# Altium PCB 175-00060, rev1, PCB, NRES RTD_TEC Board.PcbDoc (part 1 of 3)
Units mm, origin at the board's own origin, x right, y up, seen from the top; angles counter-clockwise.
Board outline 188.3 x 85 mm, 7 copper layers (Top Layer (*.GTL), MidLayer1 (*.G1), InternalPlane1 (*.GP1), InternalPlane2 (*.GP2), InternalPlane3 (*.GP3), InternalPlane4 (*.GP4), Bottom Layer (*.GBL)); 241 components, 178 nets, 958 pads, 584 vias.
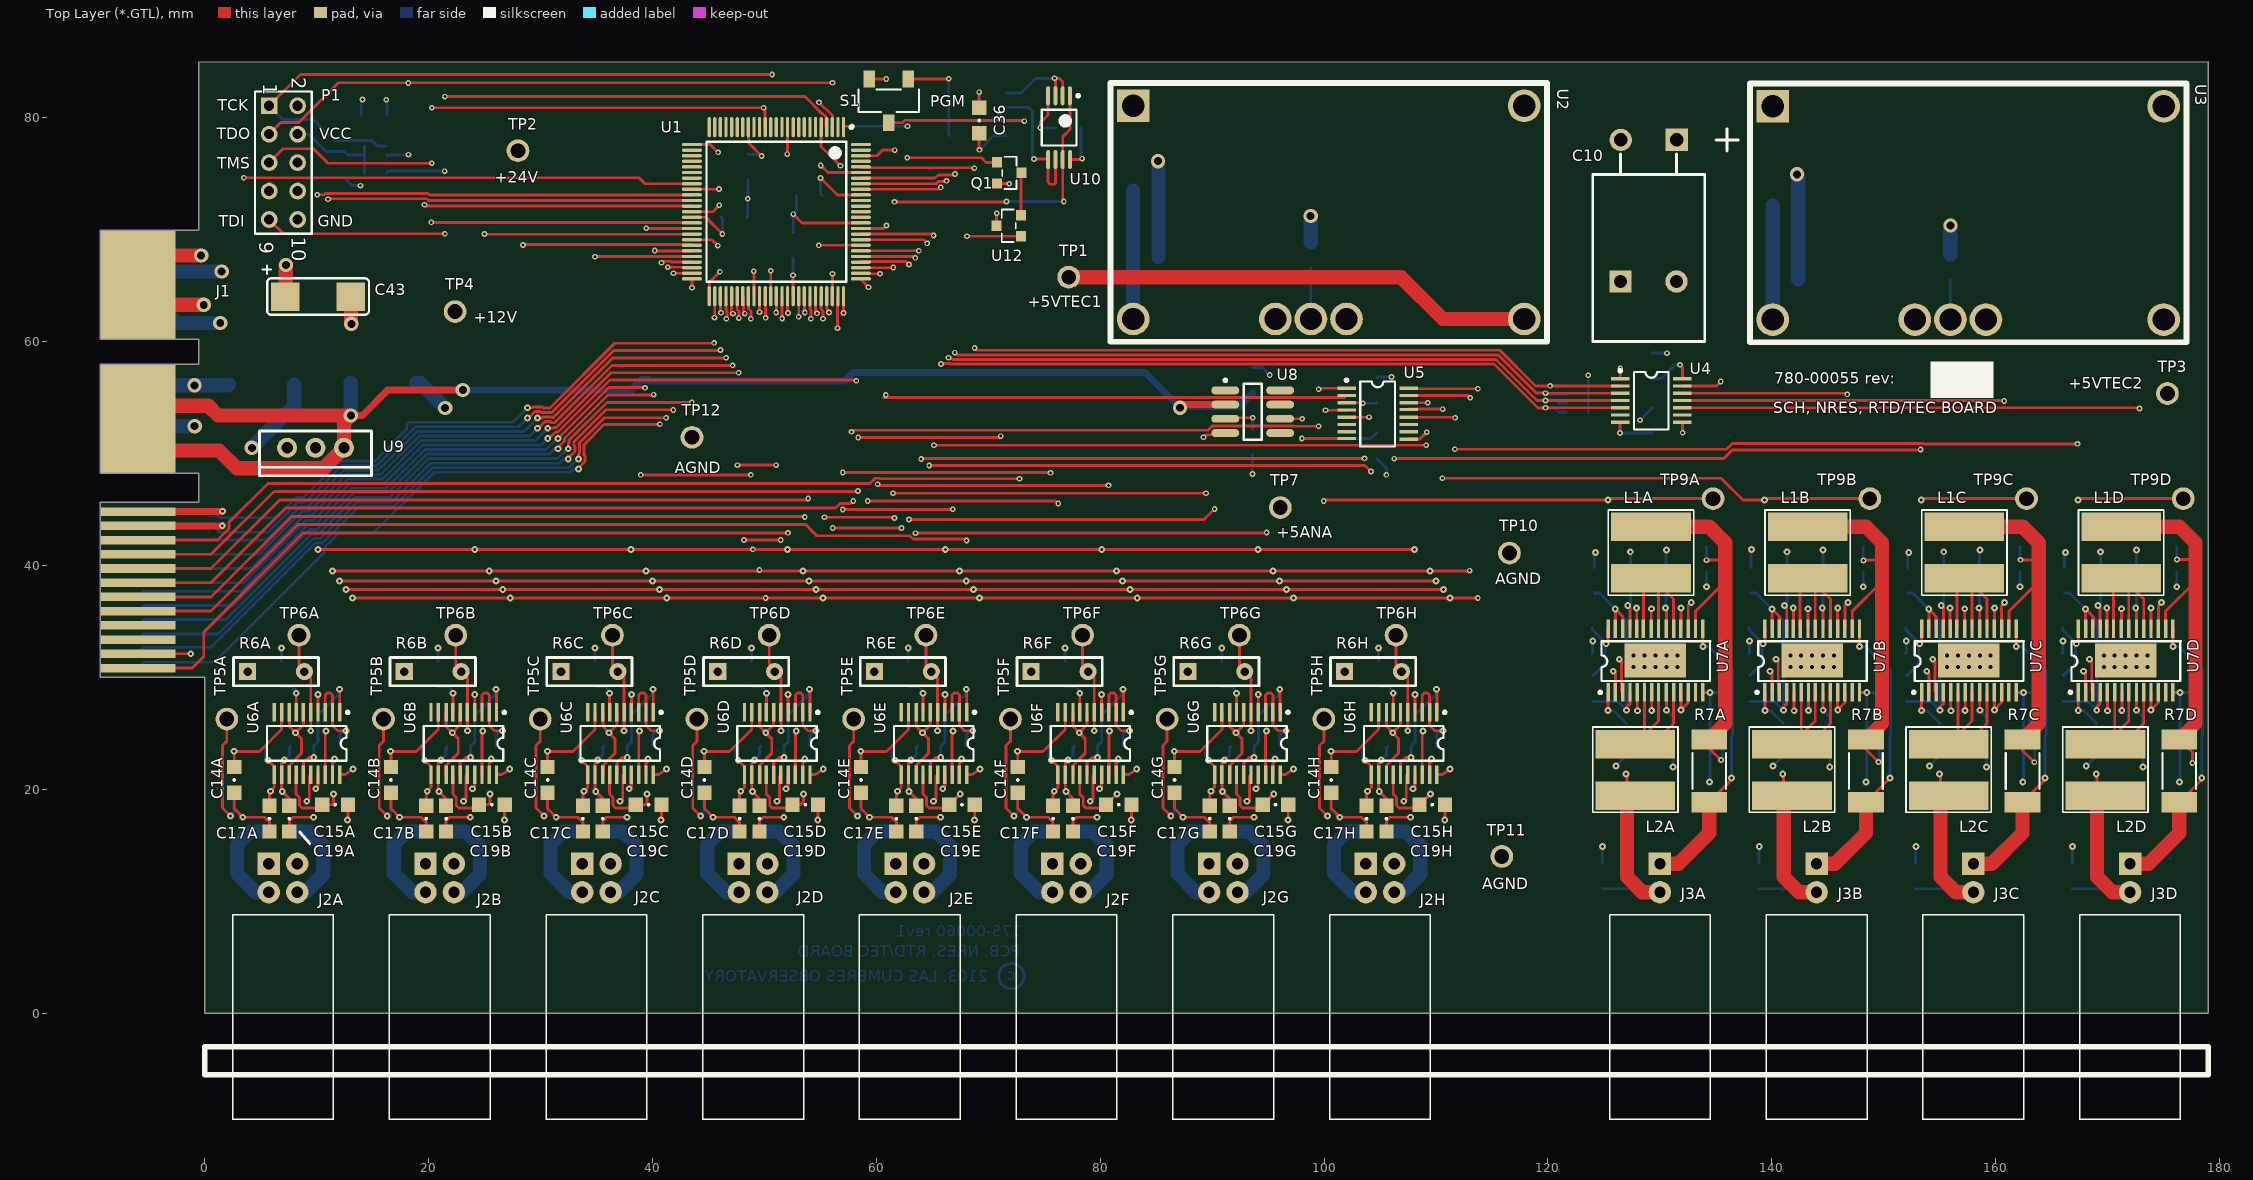
[diagram p0: Top Layer (*.GTL) view]
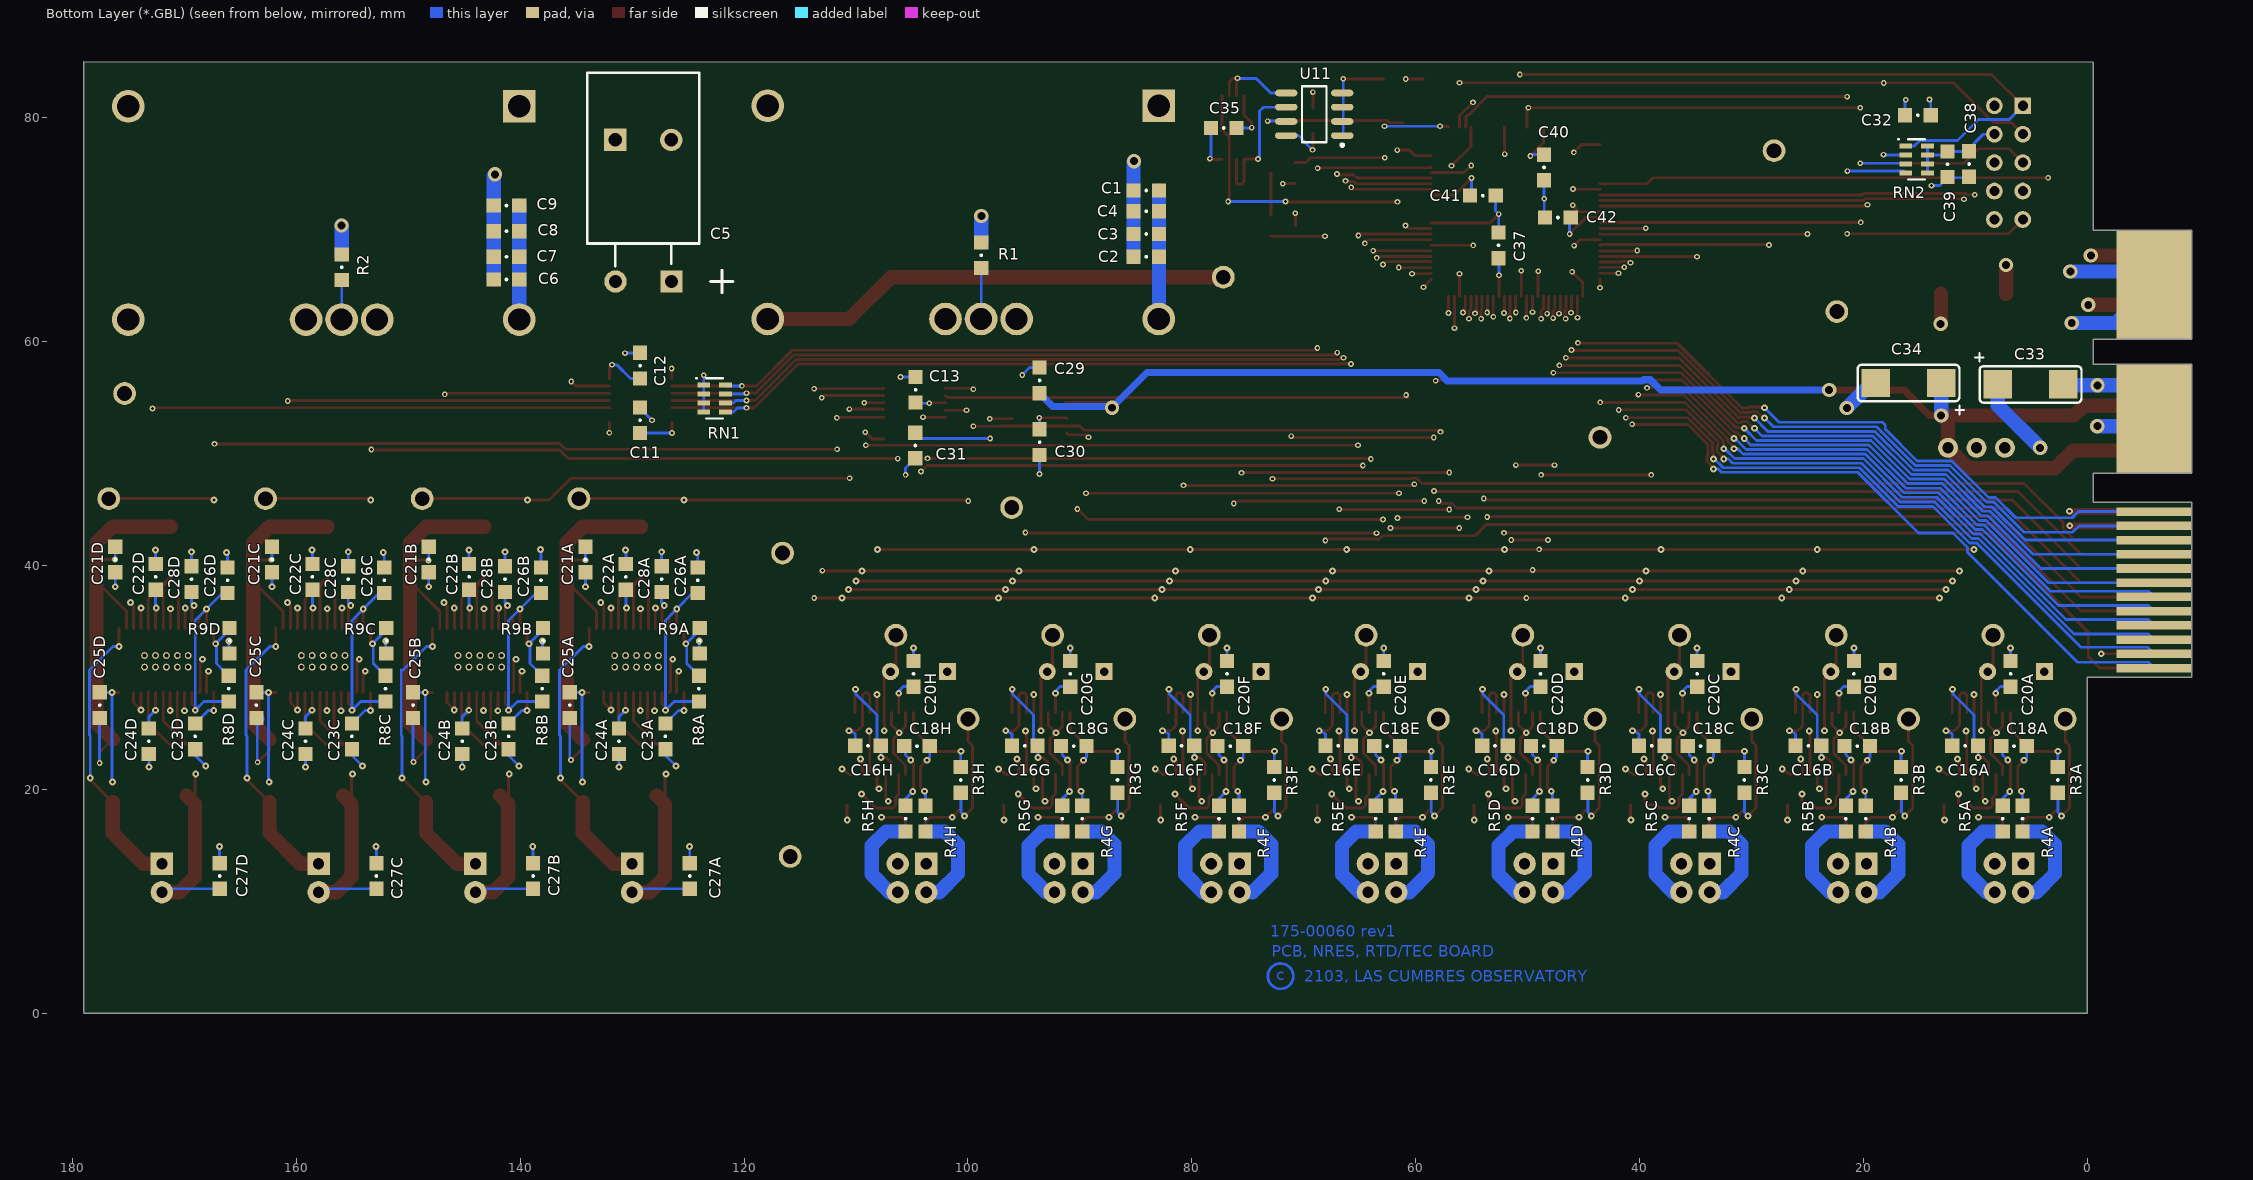
[diagram p1: Bottom Layer (*.GBL) view, seen from below]
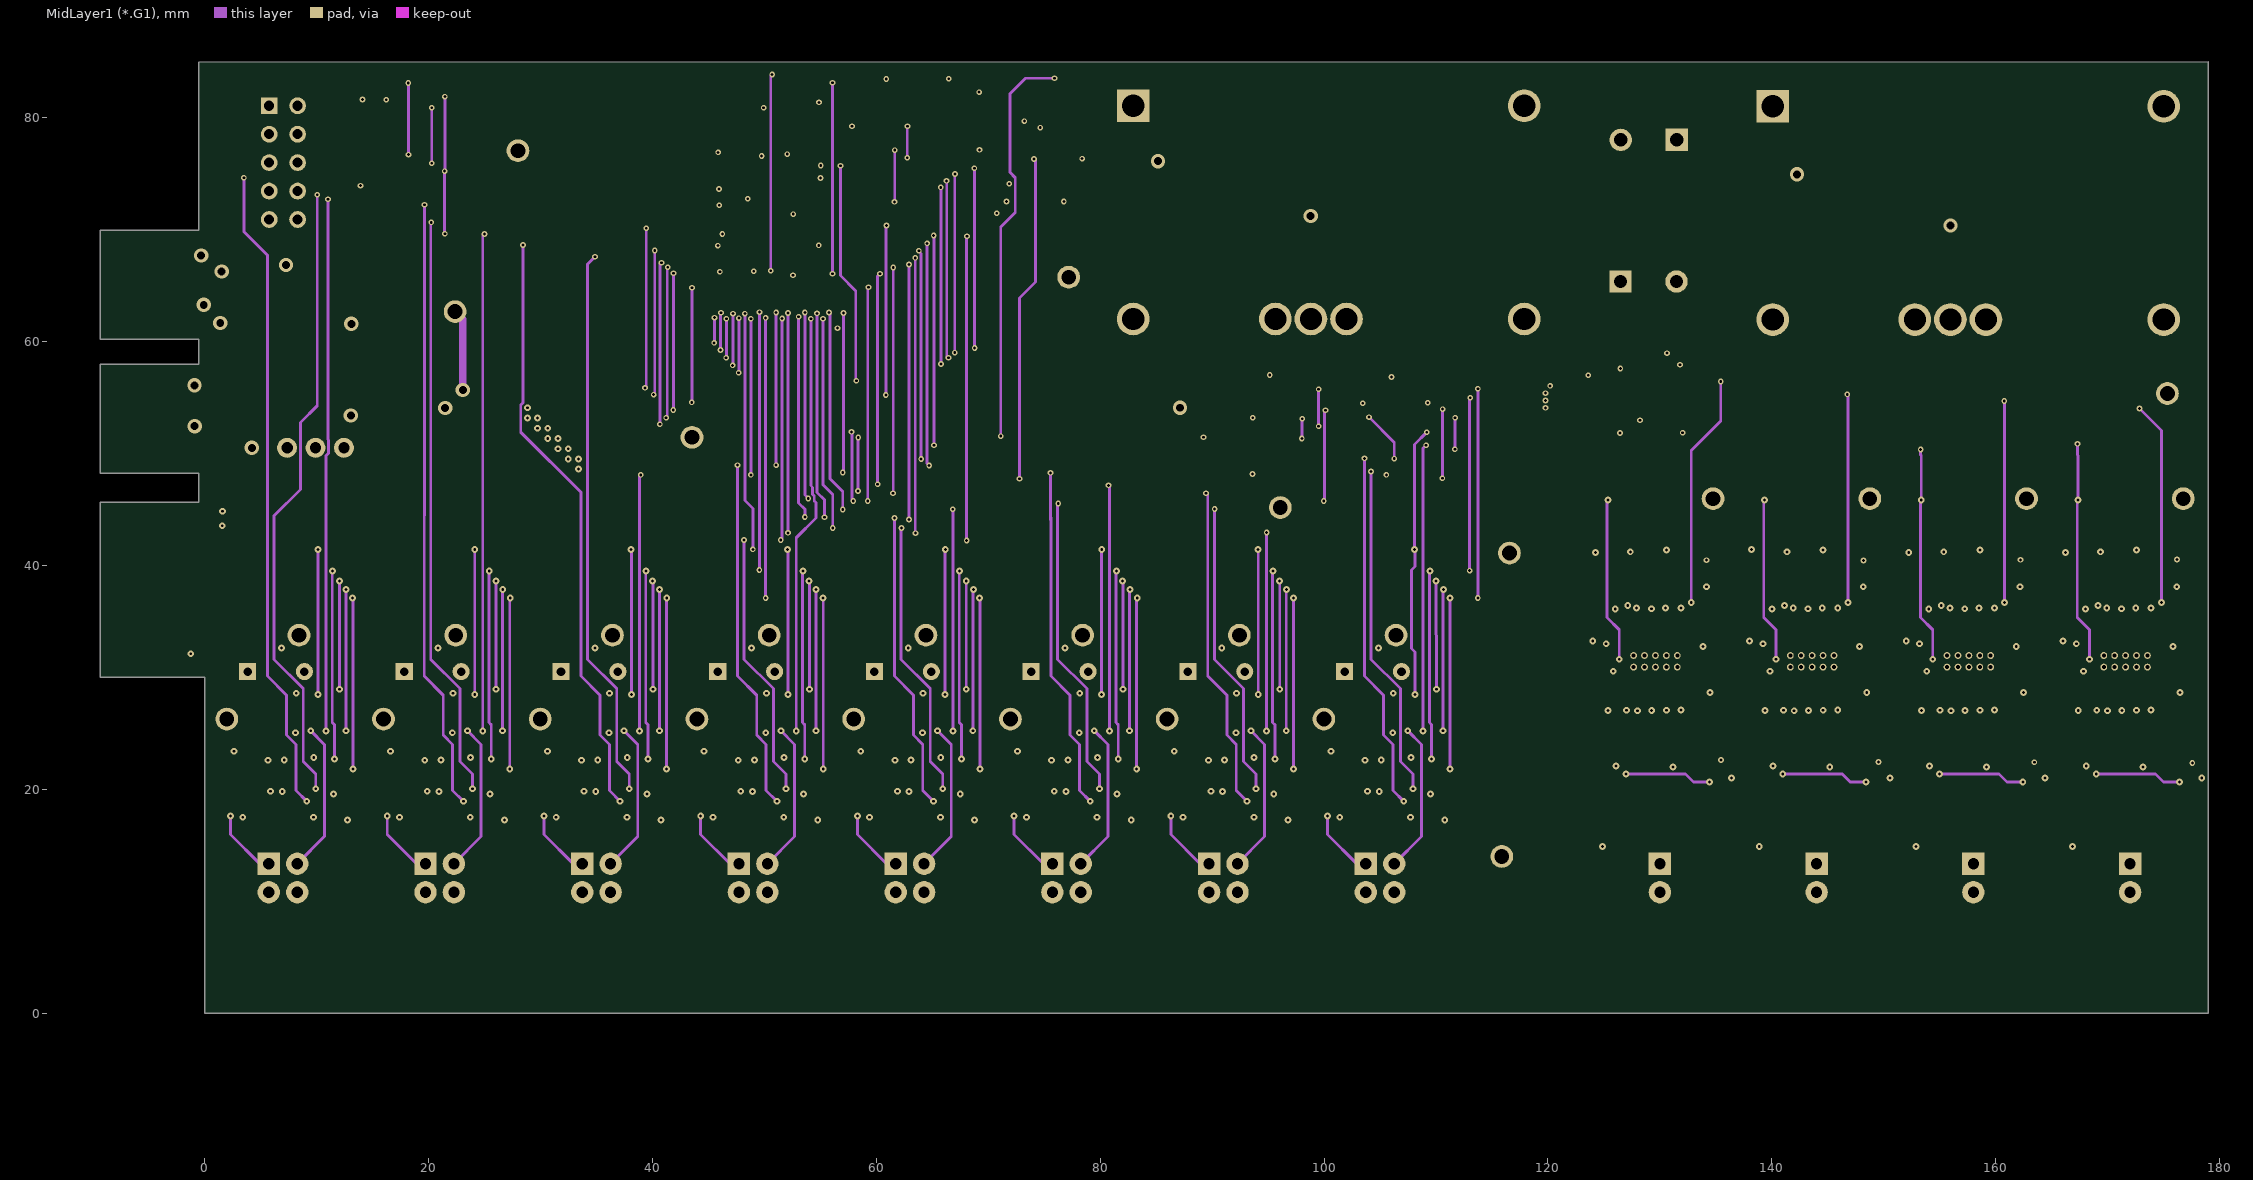
[diagram p2: MidLayer1 (*.G1)]
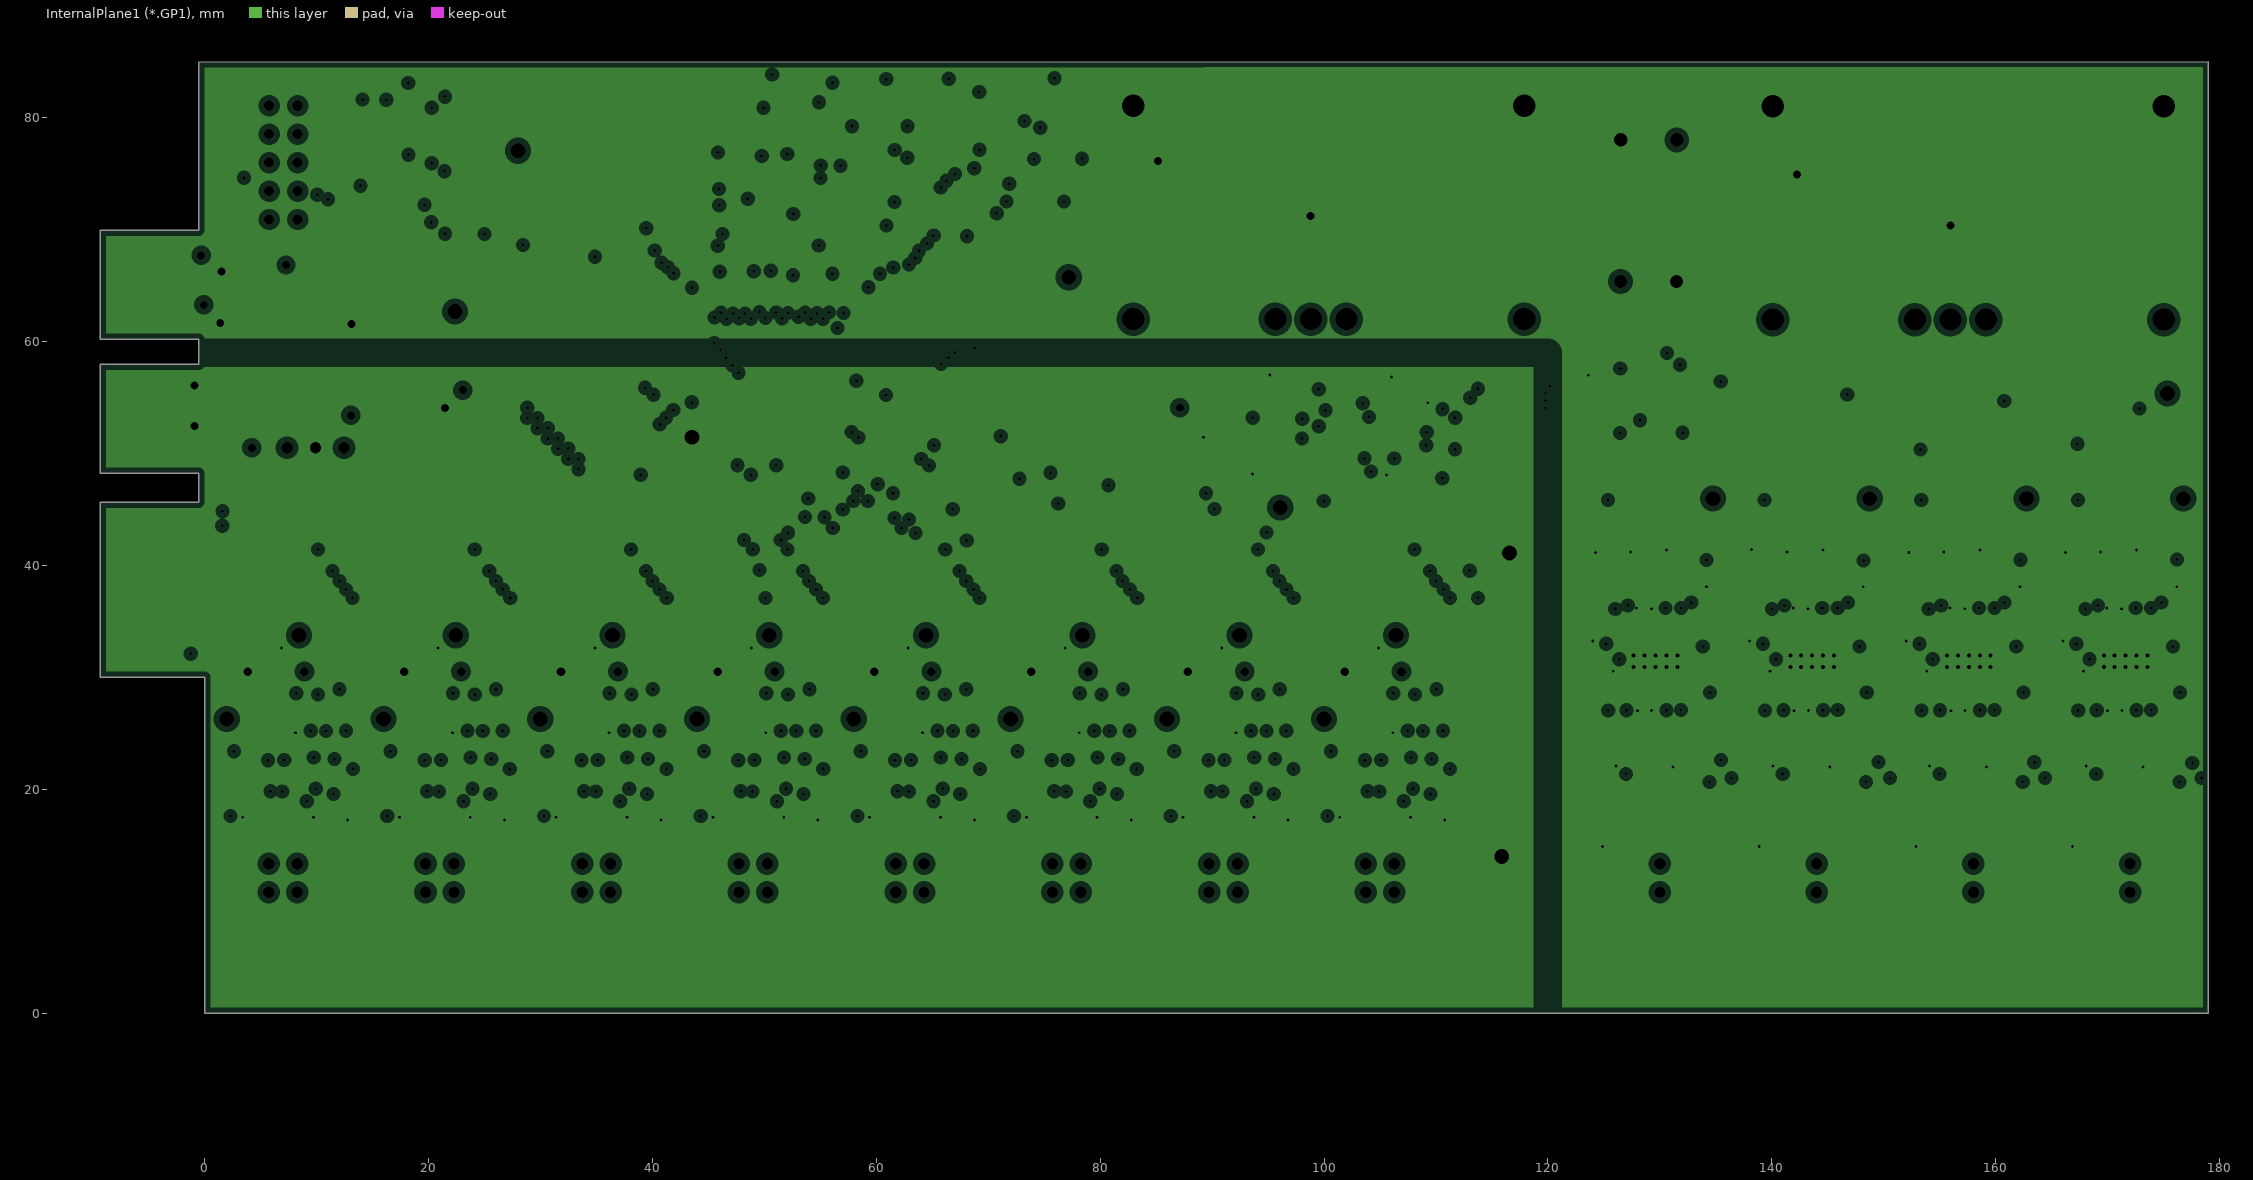
[diagram p3: InternalPlane1 (*.GP1), clearances drawn from the general rule]
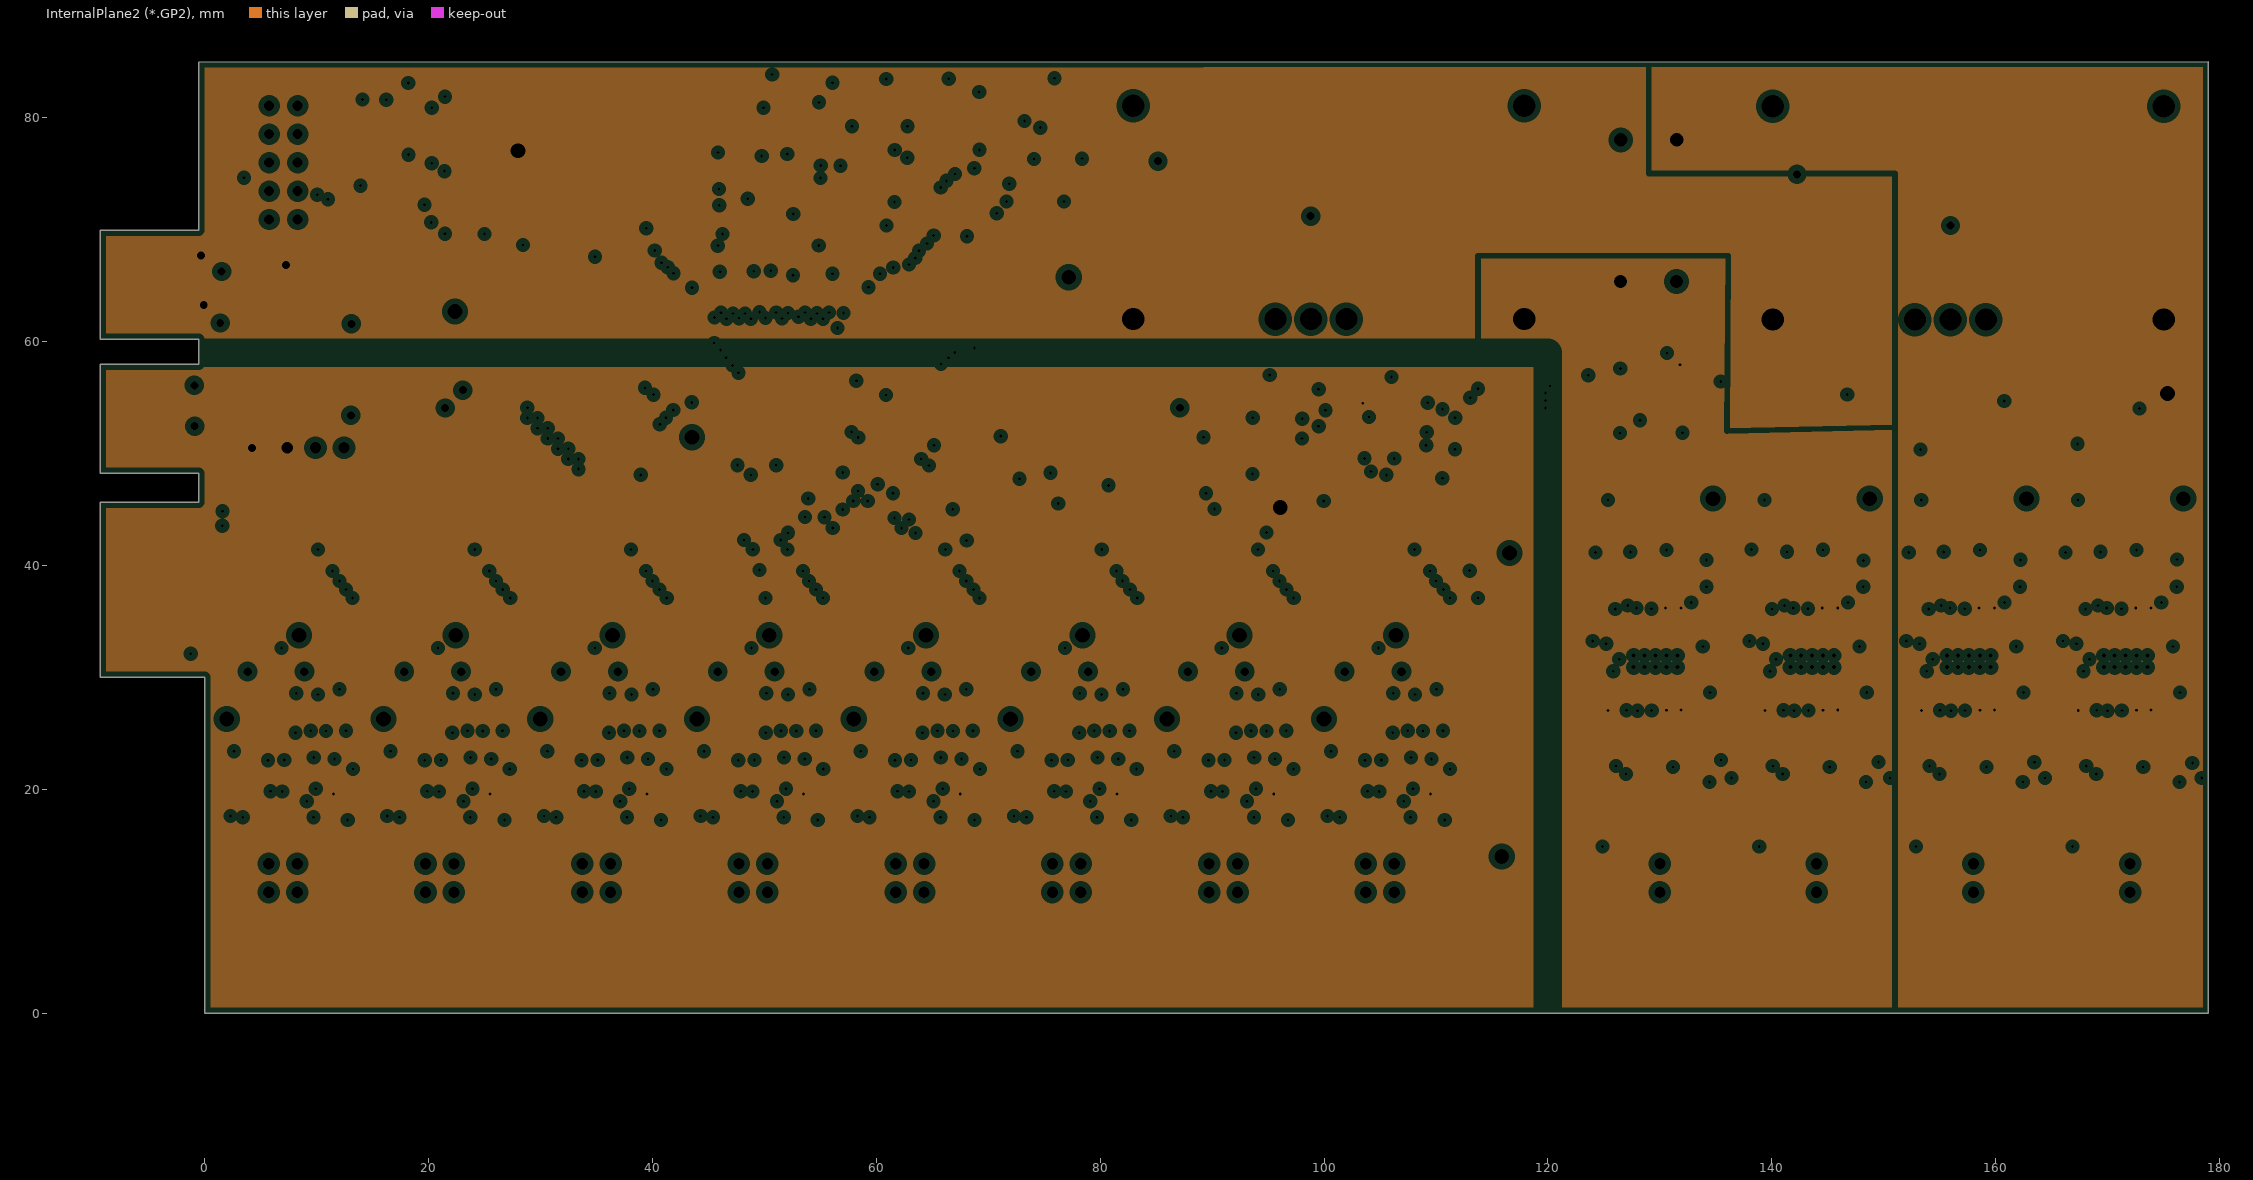
[diagram p4: InternalPlane2 (*.GP2), clearances drawn from the general rule]
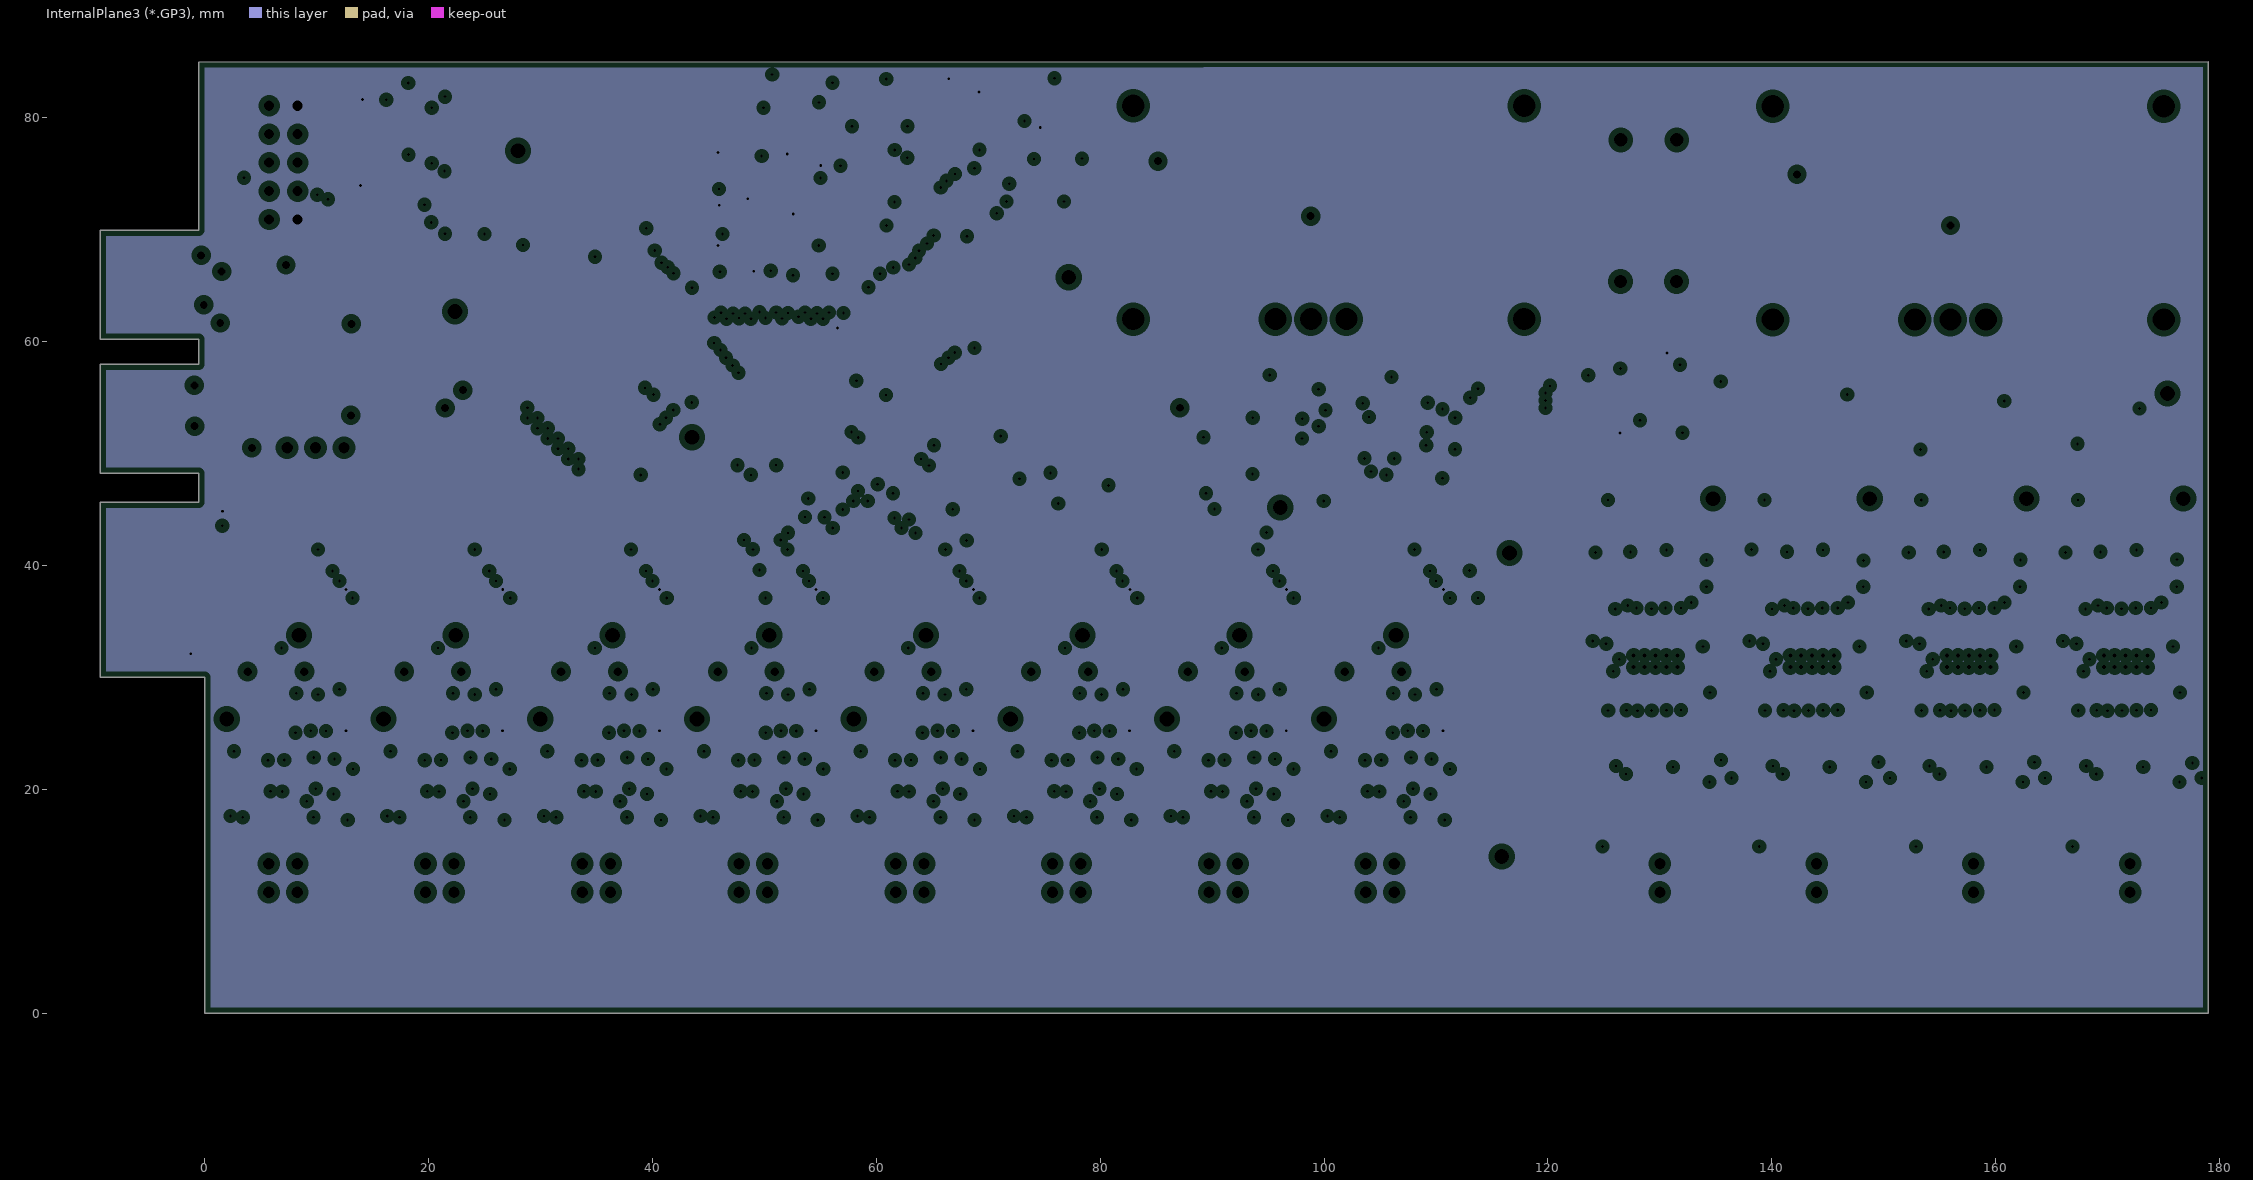
[diagram p5: InternalPlane3 (*.GP3), clearances drawn from the general rule]
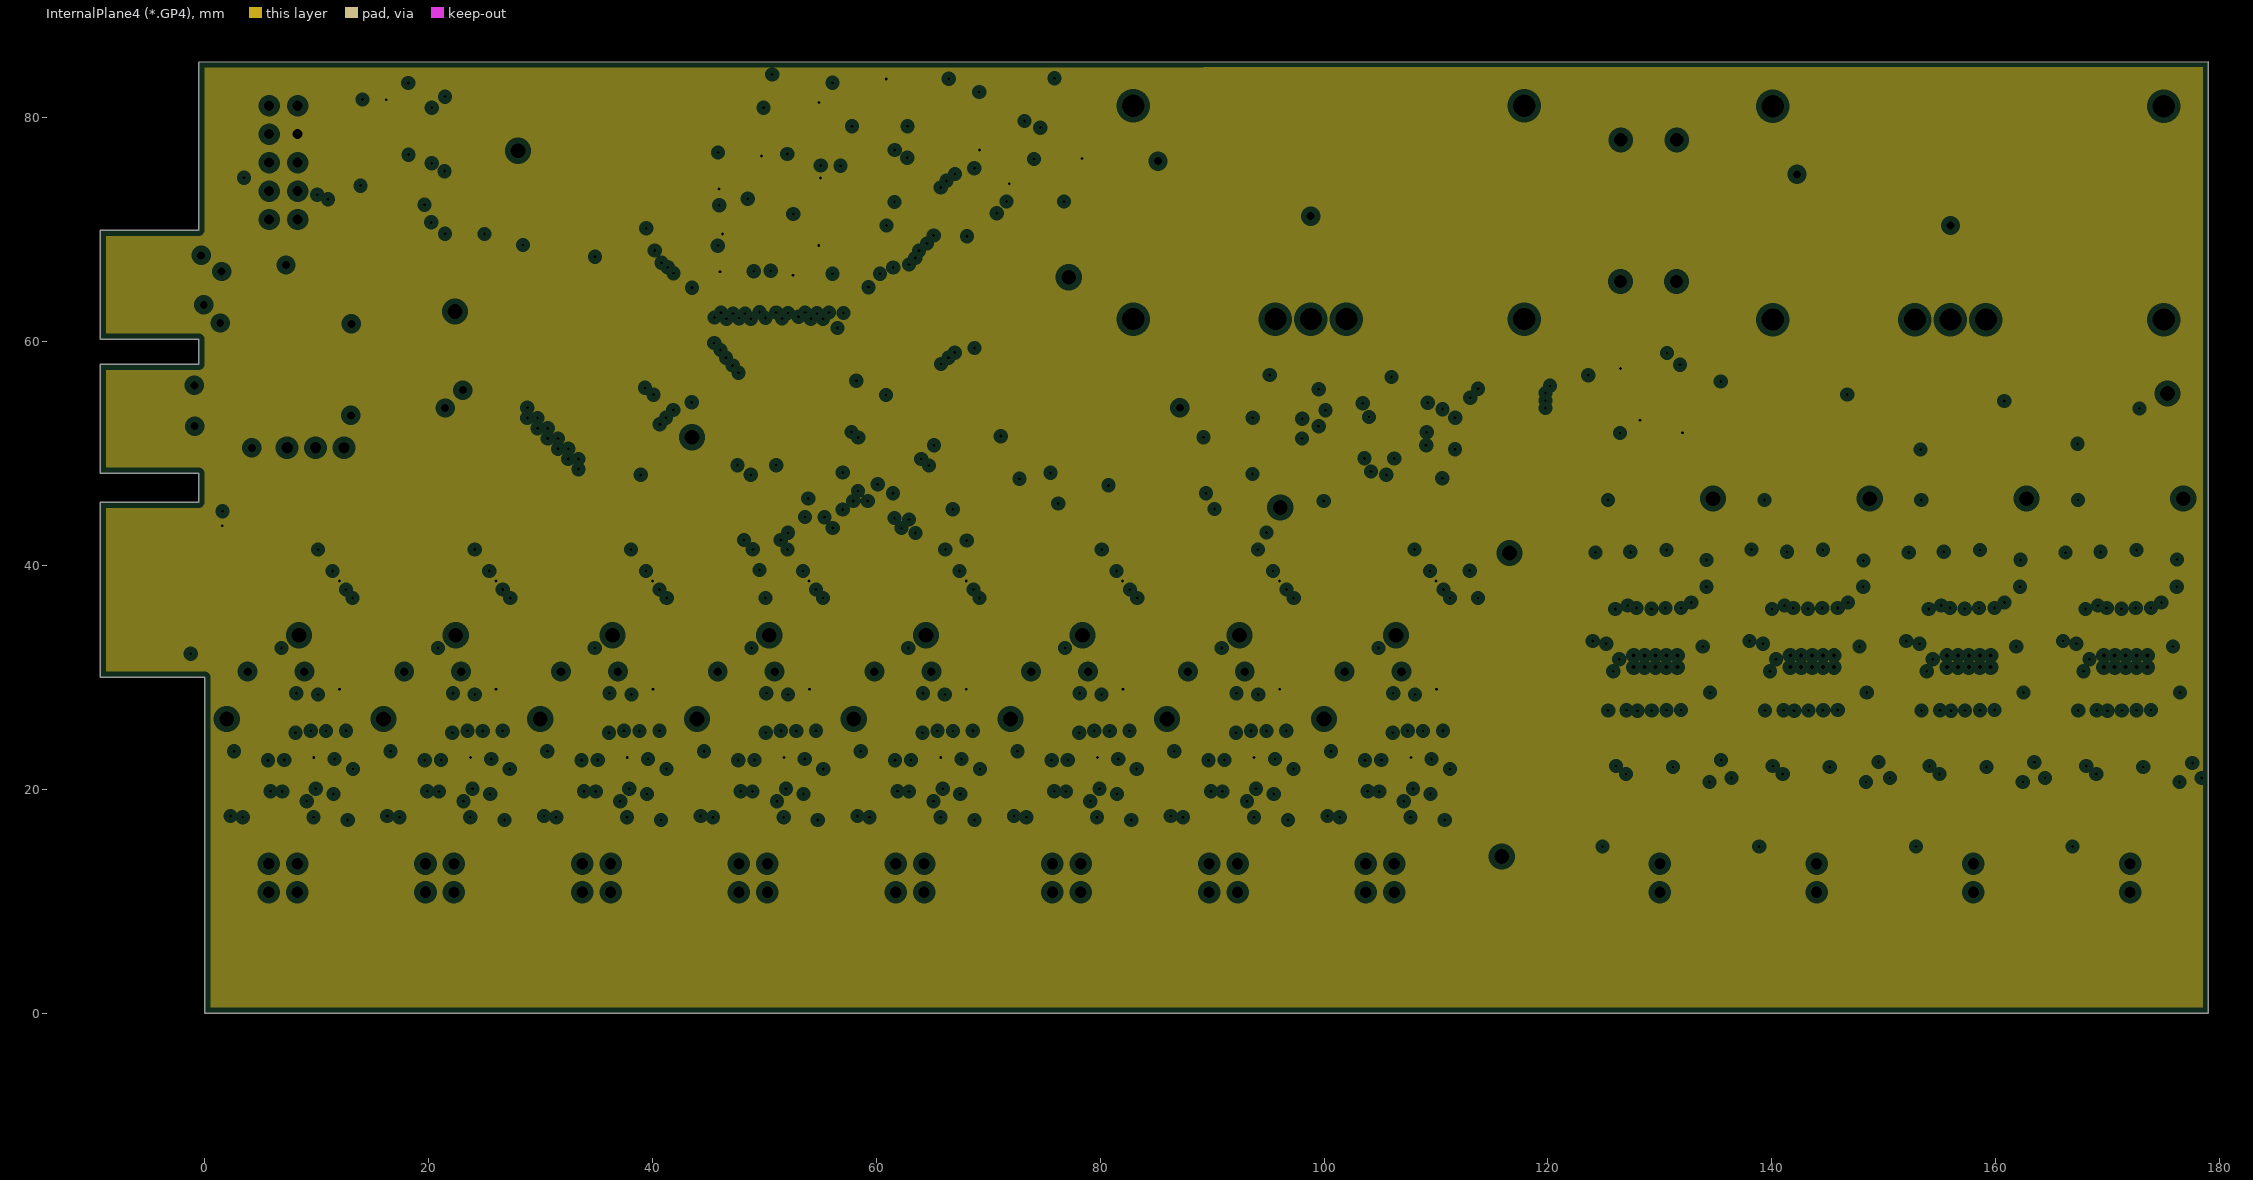
[diagram p6: InternalPlane4 (*.GP4), clearances drawn from the general rule]

## Layer stack, top to bottom
Top Layer (*.GTL): signal copper 0.0356
Dielectric: core 0.32, FR-4, Dk 4.8
MidLayer1 (*.G1): signal copper 0.0356
Dielectric: prepreg 0.32, FR-4, Dk 4.8
InternalPlane1 (*.GP1): plane copper 0.0356, net (Multiple Nets)
Dielectric: core 0.32, FR-4, Dk 4.8
InternalPlane2 (*.GP2): plane copper 0.0356, net (Multiple Nets)
Dielectric: prepreg 0.32, FR-4, Dk 4.8
InternalPlane3 (*.GP3): plane copper 0.0356, net D
Dielectric: core 0.32, FR-4, Dk 4.8
InternalPlane4 (*.GP4): plane copper 0.0356, net VCC
Dielectric: prepreg 0.32, FR-4, Dk 4.8
Bottom Layer (*.GBL): signal copper 0.0356

## Board outline
-9.303,30 -9.303,45.621 -0.54,45.621 -0.54,48.212 -9.303,48.212 -9.303,57.94 -0.54,57.94 -0.54,60.201 -9.303,60.201 -9.303,69.929 -0.54,69.929 -0.54,84.929 179,85 179,0 0,0 0,30

## Design rules (kind name [scope] priority, off if disabled: settings)
Clearance [All] p1: gap=0.152
MinimumSolderMaskSliver [All] p1: minsoldermaskwidth=0
PlaneClearance [All] p1: clearance=0.508
PlaneConnect PlaneConnect_2 [InNet('VCC')] p1: planeconnectstyle=Direct reliefexpansion=0.508 reliefentries=4 reliefconductorwidth=0.254 reliefairgap=0.254
PlaneConnect PlaneConnect_1 [(HasFootprint('TSSOP28 Exposed Pad'))] p2: planeconnectstyle=Direct reliefexpansion=0.508 reliefentries=4 reliefconductorwidth=0.254 reliefairgap=0.254
PlaneConnect [All] p3: planeconnectstyle=Relief reliefexpansion=0.508 reliefentries=4 reliefconductorwidth=0.254 reliefairgap=0.254
PolygonConnect [All] p1: connectstyle=Relief reliefconductorwidth=0.254 reliefentries=4 polygonreliefangle="90 Angle"
RoomDefinition U1_FPGA [InComponentClass('U1_FPGA')] p1: confinementstyle=ConfineIn formatcopy=TRUE lockcomponents=FALSE outline 9.786,62.58 60.078,62.58 60.078,80.614 9.786,80.614
RoomDefinition TEC_Ch3 [InComponentClass('TEC_Ch3')] p2: confinementstyle=ConfineIn formatcopy=TRUE lockcomponents=FALSE outline 163.313,-11.552 179.874,-11.552 179.874,51.034 163.313,51.034
RoomDefinition TEC_Ch2 [InComponentClass('TEC_Ch2')] p3: confinementstyle=ConfineIn formatcopy=TRUE lockcomponents=FALSE outline 149.313,-11.552 165.874,-11.552 165.874,51.034 149.313,51.034
RoomDefinition TEC_Ch1 [InComponentClass('TEC_Ch1')] p4: confinementstyle=ConfineIn formatcopy=FALSE lockcomponents=FALSE outline 135.313,-11.552 151.874,-11.552 151.874,51.034 135.313,51.034
RoomDefinition TEC_Ch0 [InComponentClass('TEC_Ch0')] p5: confinementstyle=ConfineIn formatcopy=FALSE lockcomponents=FALSE outline 121.313,-11.552 137.874,-11.552 137.874,51.034 121.313,51.034
RoomDefinition "Power Supplies" [InComponentClass('Power Supplies')] p6: confinementstyle=ConfineIn formatcopy=TRUE lockcomponents=FALSE outline -18.339,-61.722 338.506,-61.722 338.506,156.413 -18.339,156.413
RoomDefinition ADC_Ch7 [InComponentClass('ADC_Ch7')] p7: confinementstyle=ConfineIn formatcopy=TRUE lockcomponents=FALSE outline 97.507,-10.79 112.239,-10.79 112.239,36.708 97.507,36.708
RoomDefinition ADC_Ch6 [InComponentClass('ADC_Ch6')] p8: confinementstyle=ConfineIn formatcopy=TRUE lockcomponents=FALSE outline 83.507,-10.79 98.239,-10.79 98.239,36.708 83.507,36.708
RoomDefinition ADC_Ch5 [InComponentClass('ADC_Ch5')] p9: confinementstyle=ConfineIn formatcopy=TRUE lockcomponents=FALSE outline 69.507,-10.79 84.239,-10.79 84.239,36.708 69.507,36.708
RoomDefinition ADC_Ch4 [InComponentClass('ADC_Ch4')] p10: confinementstyle=ConfineIn formatcopy=TRUE lockcomponents=FALSE outline 55.507,-10.79 70.239,-10.79 70.239,36.708 55.507,36.708
RoomDefinition ADC_Ch3 [InComponentClass('ADC_Ch3')] p11: confinementstyle=ConfineIn formatcopy=TRUE lockcomponents=FALSE outline 41.507,-10.79 56.239,-10.79 56.239,36.708 41.507,36.708
RoomDefinition ADC_Ch2 [InComponentClass('ADC_Ch2')] p12: confinementstyle=ConfineIn formatcopy=TRUE lockcomponents=FALSE outline 27.507,-10.79 42.239,-10.79 42.239,36.708 27.507,36.708
RoomDefinition ADC_Ch1 [InComponentClass('ADC_Ch1')] p13: confinementstyle=ConfineIn formatcopy=FALSE lockcomponents=FALSE outline 13.507,-10.79 28.239,-10.79 28.239,36.708 13.507,36.708
RoomDefinition ADC_Ch0 [InComponentClass('ADC_Ch0')] p14: confinementstyle=ConfineIn formatcopy=TRUE lockcomponents=FALSE outline -0.493,-10.79 14.239,-10.79 14.239,36.708 -0.493,36.708
RoomDefinition "780-00055, rev1, Pg1, SCH, NRES Temp Meas, 8-Chan RTD" [InComponentClass('780-00055, rev1, Pg1, SCH, NRES Temp Meas, 8-Chan RTD ')] p15: confinementstyle=ConfineIn formatcopy=TRUE lockcomponents=FALSE outline -28.524,-68.047 346.634,-68.047 346.634,163.932 -28.524,163.932
RoutingVias [All] p1: holewidth=0.254 width=0.61 viastyle="Through Hole" minholewidth=0.254 minwidth=0.508 maxholewidth=1.27 maxwidth=1.27
SilkToSilkClearance [All] p1: silktosilkclearance=0.025
SilkscreenOverComponentPads [All] p1: minsilkscreentomaskgap=0.025
SolderMaskExpansion [All] p1: expansion=0.102
Width [All] p1: maxlimit=2.54 minlimit=0.254 preferedwidth=0.254 minimp=50.000000 maximp=50.000000 favimp=50.000000
23 further rules are at their usual default settings.

## Classes and differential pairs
component class U1_FPGA: C37 C38 C39 C40 C41 C42 U1
component class TEC_Ch3: C21D C22D C23D C24D C25D C26D C27D C28D J3D L1D L2D R7D R8D R9D TP9D U7D
component class TEC_Ch2: C21C C22C C23C C24C C25C C26C C27C C28C J3C L1C L2C R7C R8C R9C TP9C U7C
component class TEC_Ch1: C21B C22B C23B C24B C25B C26B C27B C28B J3B L1B L2B R7B R8B R9B TP9B U7B
component class TEC_Ch0: C21A C22A C23A C24A C25A C26A C27A C28A J3A L1A L2A R7A R8A R9A TP9A U7A
component class "Power Supplies": C1 C2 C3 C4 C5 C6 C7 C8 C9 C10 C33 C34 C35 C36 C43 Q1 R1 R2 S1 TP1 TP2 TP3 TP4 TP7 TP10 TP11 TP12 U2 U3 U9 U10 U11 U12
component class ADC_Ch7: C14H C15H C16H C17H C18H C19H C20H J2H R3H R4H R5H R6H TP5H TP6H U6H
component class ADC_Ch6: C14G C15G C16G C17G C18G C19G C20G J2G R3G R4G R5G R6G TP5G TP6G U6G
component class ADC_Ch5: C14F C15F C16F C17F C18F C19F C20F J2F R3F R4F R5F R6F TP5F TP6F U6F
component class ADC_Ch4: C14E C15E C16E C17E C18E C19E C20E J2E R3E R4E R5E R6E TP5E TP6E U6E
component class ADC_Ch3: C14D C15D C16D C17D C18D C19D C20D J2D R3D R4D R5D R6D TP5D TP6D U6D
component class ADC_Ch2: C14C C15C C16C C17C C18C C19C C20C J2C R3C R4C R5C R6C TP5C TP6C U6C
component class ADC_Ch1: C14B C15B C16B C17B C18B C19B C20B J2B R3B R4B R5B R6B TP5B TP6B U6B
component class ADC_Ch0: C14A C15A C16A C17A C18A C19A C20A J2A R3A R4A R5A R6A TP5A TP6A U6A
component class "780-00055, rev1, Pg1, SCH, NRES Temp Meas, 8-Chan RTD": C11 C12 C13 C29 C30 C31 C32 J1 P1 RN1 RN2 U4 U5 U8
channel class "780-00055, rev1, Pg2, SCH, NRES Temp Meas, 8-Chan RTD": ADC_Ch0 ADC_Ch1 ADC_Ch2 ADC_Ch3 ADC_Ch4 ADC_Ch5 ADC_Ch6 ADC_Ch7
channel class "780-00055, rev1, Pg3, SCH, NRES Temp Meas, 8-Chan RTD": TEC_Ch0 TEC_Ch1 TEC_Ch2 TEC_Ch3

## Components (designator, comment, footprint, x,y, rotation, side; value= is the part's Value field where it differs from the comment)
C1 "35V CER" SMD_0805 84.074,73.482 r180 bottom
C2 "35V CER" SMD_0805 84.074,67.564 r180 bottom
C3 "35V CER" SMD_0805 84.074,69.596 r180 bottom
C4 "35V CER" SMD_0805 84.074,71.628 r180 bottom
C5 "35V" "CAP, Thru Hole 10mm dia" 128.981,65.354 r180 bottom
C6 "35V CER" SMD_0805 141.224,65.532 r180 bottom
C7 "35V CER" SMD_0805 141.224,67.564 r180 bottom
C8 "35V CER" SMD_0805 141.224,69.85 r180 bottom
C9 "35V CER" SMD_0805 141.224,72.136 r180 bottom
C10 "35V" "CAP, Thru Hole 10mm dia" 129,78 r0 top
C11 "Cap SMD" SMD_0805 129.286,52.959 r270 bottom
C12 "Cap SMD" SMD_0805 129.286,57.836 r90 bottom
C13 "1u" SMD_0805 104.673,55.677 r270 bottom
C14A "16V" SMD_0805 2.642,20.828 r90 top (schematic designator C14)
C14B "16V" SMD_0805 16.642,20.828 r90 top (schematic designator C14)
C14C "16V" SMD_0805 30.642,20.828 r90 top (schematic designator C14)
C14D "16V" SMD_0805 44.642,20.828 r90 top (schematic designator C14)
C14E "16V" SMD_0805 58.642,20.828 r90 top (schematic designator C14)
C14F "16V" SMD_0805 72.642,20.828 r90 top (schematic designator C14)
C14G "16V" SMD_0805 86.642,20.828 r90 top (schematic designator C14)
C14H "16V" SMD_0805 100.642,20.828 r90 top (schematic designator C14)
C15A "16V" SMD_0805 11.659,18.618 r180 top (schematic designator C15)
C15B "16V" SMD_0805 25.659,18.618 r180 top (schematic designator C15)
C15C "16V" SMD_0805 39.659,18.618 r180 top (schematic designator C15)
C15D "16V" SMD_0805 53.659,18.618 r180 top (schematic designator C15)
C15E "16V" SMD_0805 67.659,18.618 r180 top (schematic designator C15)
C15F "16V" SMD_0805 81.659,18.618 r180 top (schematic designator C15)
C15G "16V" SMD_0805 95.659,18.618 r180 top (schematic designator C15)
C15H "16V" SMD_0805 109.659,18.618 r180 top (schematic designator C15)
C16A "16V" SMD_0805 10.922,23.876 r180 bottom (schematic designator C16)
C16B "16V" SMD_0805 24.922,23.876 r180 bottom (schematic designator C16)
C16C "16V" SMD_0805 38.922,23.876 r180 bottom (schematic designator C16)
C16D "16V" SMD_0805 52.922,23.876 r180 bottom (schematic designator C16)
C16E "16V" SMD_0805 66.922,23.876 r180 bottom (schematic designator C16)
C16F "16V" SMD_0805 80.922,23.876 r180 bottom (schematic designator C16)
C16G "16V" SMD_0805 94.922,23.876 r180 bottom (schematic designator C16)
C16H "16V" SMD_0805 108.922,23.876 r180 bottom (schematic designator C16)
C17A "Cap SMD" SMD_0805 5.791,17.374 r90 top (schematic designator C17)
C17B "Cap SMD" SMD_0805 19.791,17.374 r90 top (schematic designator C17)
C17C "Cap SMD" SMD_0805 33.791,17.374 r90 top (schematic designator C17)
C17D "Cap SMD" SMD_0805 47.791,17.374 r90 top (schematic designator C17)
C17E "Cap SMD" SMD_0805 61.791,17.374 r90 top (schematic designator C17)
C17F "Cap SMD" SMD_0805 75.791,17.374 r90 top (schematic designator C17)
C17G "Cap SMD" SMD_0805 89.791,17.374 r90 top (schematic designator C17)
C17H "Cap SMD" SMD_0805 103.791,17.374 r90 top (schematic designator C17)
C18A "Cap SMD" SMD_0805 6.553,23.851 r180 bottom (schematic designator C18)
C18B "Cap SMD" SMD_0805 20.553,23.851 r180 bottom (schematic designator C18)
C18C "Cap SMD" SMD_0805 34.553,23.851 r180 bottom (schematic designator C18)
C18D "Cap SMD" SMD_0805 48.553,23.851 r180 bottom (schematic designator C18)
C18E "Cap SMD" SMD_0805 62.553,23.851 r180 bottom (schematic designator C18)
C18F "Cap SMD" SMD_0805 76.553,23.851 r180 bottom (schematic designator C18)
C18G "Cap SMD" SMD_0805 90.553,23.851 r180 bottom (schematic designator C18)
C18H "Cap SMD" SMD_0805 104.553,23.851 r180 bottom (schematic designator C18)
C19A "Cap SMD" SMD_0805 7.569,17.374 r90 top (schematic designator C19)
C19B "Cap SMD" SMD_0805 21.569,17.374 r90 top (schematic designator C19)
C19C "Cap SMD" SMD_0805 35.569,17.374 r90 top (schematic designator C19)
C19D "Cap SMD" SMD_0805 49.569,17.374 r90 top (schematic designator C19)
C19E "Cap SMD" SMD_0805 63.569,17.374 r90 top (schematic designator C19)
C19F "Cap SMD" SMD_0805 77.569,17.374 r90 top (schematic designator C19)
C19G "Cap SMD" SMD_0805 91.569,17.374 r90 top (schematic designator C19)
C19H "Cap SMD" SMD_0805 105.569,17.374 r90 top (schematic designator C19)
C20A "16V" SMD_0805 6.858,30.302 r270 bottom (schematic designator C20)
C20B "16V" SMD_0805 20.858,30.302 r270 bottom (schematic designator C20)
C20C "16V" SMD_0805 34.858,30.302 r270 bottom (schematic designator C20)
C20D "16V" SMD_0805 48.858,30.302 r270 bottom (schematic designator C20)
C20E "16V" SMD_0805 62.858,30.302 r270 bottom (schematic designator C20)
C20F "16V" SMD_0805 76.858,30.302 r270 bottom (schematic designator C20)
C20G "16V" SMD_0805 90.858,30.302 r270 bottom (schematic designator C20)
C20H "16V" SMD_0805 104.858,30.302 r270 bottom (schematic designator C20)
C21A "Cap SMD" SMD_0805 134.166,40.518 r270 bottom (schematic designator C21)
C21B "Cap SMD" SMD_0805 148.165,40.518 r270 bottom (schematic designator C21)
C21C "Cap SMD" SMD_0805 162.166,40.518 r270 bottom (schematic designator C21)
C21D "Cap SMD" SMD_0805 176.166,40.518 r270 bottom (schematic designator C21)
C22A "Cap SMD" SMD_0805 130.559,38.969 r270 bottom (schematic designator C22)
C22B "Cap SMD" SMD_0805 144.559,38.969 r270 bottom (schematic designator C22)
C22C "Cap SMD" SMD_0805 158.559,38.969 r270 bottom (schematic designator C22)
C22D "Cap SMD" SMD_0805 172.559,38.969 r270 bottom (schematic designator C22)
C23A "Cap SMD" SMD_0805 127.028,24.719 r90 bottom (schematic designator C23)
C23B "Cap SMD" SMD_0805 141.028,24.719 r90 bottom (schematic designator C23)
C23C "Cap SMD" SMD_0805 155.028,24.719 r90 bottom (schematic designator C23)
C23D "Cap SMD" SMD_0805 169.028,24.719 r90 bottom (schematic designator C23)
C24A "Cap SMD" SMD_0805 131.168,24.287 r90 bottom (schematic designator C24)
C24B "Cap SMD" SMD_0805 145.168,24.287 r90 bottom (schematic designator C24)
C24C "Cap SMD" SMD_0805 159.168,24.287 r90 bottom (schematic designator C24)
C24D "Cap SMD" SMD_0805 173.168,24.287 r90 bottom (schematic designator C24)
C25A "16V" SMD_0805 135.563,27.513 r270 bottom (schematic designator C25)
C25B "16V" SMD_0805 149.563,27.513 r270 bottom (schematic designator C25)
C25C "16V" SMD_0805 163.563,27.513 r270 bottom (schematic designator C25)
C25D "16V" SMD_0805 177.563,27.513 r270 bottom (schematic designator C25)
C26A "Cap SMD" SMD_0805 124.133,38.664 r270 bottom (schematic designator C26)
C26B "Cap SMD" SMD_0805 138.132,38.664 r270 bottom (schematic designator C26)
C26C "Cap SMD" SMD_0805 152.133,38.664 r270 bottom (schematic designator C26)
C26D "Cap SMD" SMD_0805 166.133,38.664 r270 bottom (schematic designator C26)
C27A "Cap SMD" SMD_0805 124.844,12.248 r270 bottom (schematic designator C27)
C27B "Cap SMD" SMD_0805 138.844,12.248 r270 bottom (schematic designator C27)
C27C "Cap SMD" SMD_0805 152.844,12.248 r270 bottom (schematic designator C27)
C27D "Cap SMD" SMD_0805 166.844,12.248 r270 bottom (schematic designator C27)
C28A "100V" SMD_0805 127.358,38.765 r270 bottom (schematic designator C28)
C28B "100V" SMD_0805 141.358,38.765 r270 bottom (schematic designator C28)
C28C "100V" SMD_0805 155.358,38.765 r270 bottom (schematic designator C28)
C28D "100V" SMD_0805 169.358,38.765 r270 bottom (schematic designator C28)
C29 "1u" SMD_0805 93.599,56.515 r90 bottom
C30 "1u" SMD_0805 93.599,51.003 r270 bottom
C31 "1u" SMD_0805 104.699,50.698 r270 bottom
C32 "Cap SMD" SMD_0805 15.138,80.213 r0 bottom
C33 "50V" SMD_CAP_6032 15.977,56.286 r180 bottom
C34 "50V" SMD_CAP_6032 5.08,56.159 r0 bottom
C35 "Cap SMD" SMD_0805 77.14,79.07 r180 bottom
C36 "Cap SMD" SMD_0805 69.19,79.731 r90 top
C37 "Cap SMD" SMD_0805 52.603,68.58 r270 bottom
C38 "Cap SMD" SMD_0805 10.566,75.844 r90 bottom
C39 "Cap SMD" SMD_0805 12.497,75.819 r90 bottom
C40 "Cap SMD" SMD_0805 48.539,75.54 r90 bottom
C41 "Cap SMD" SMD_0805 54,73.025 r0 bottom
C42 "Cap SMD" SMD_0805 47.295,71.069 r180 bottom
C43 "50V" SMD_CAP_6032 10.135,64.008 r180 top
Designator92 "Comment" "TARGET MECHANICAL 5" -18.771,-47.092 r180 top
Designator93 "Comment" "TARGET MECHANICAL 5" -19.304,94.742 r180 top
Designator94 "Comment" "TARGET MECHANICAL 5" 189.738,94.031 r180 top
J1 "PCB Edge Fingers" "PCB EDGE, MOLEX 46114" -0.54,30 r0 top
J2A "LEMO 4-pin size 0" "LEMO SIZE 0, 4-PIN PCB" 7,10.8 r180 top locked (schematic designator J2)
J2B "LEMO 4-pin size 0" "LEMO SIZE 0, 4-PIN PCB" 21,10.8 r180 top (schematic designator J2)
J2C "LEMO 4-pin size 0" "LEMO SIZE 0, 4-PIN PCB" 35,10.8 r180 top (schematic designator J2)
J2D "LEMO 4-pin size 0" "LEMO SIZE 0, 4-PIN PCB" 49,10.8 r180 top (schematic designator J2)
J2E "LEMO 4-pin size 0" "LEMO SIZE 0, 4-PIN PCB" 63,10.8 r180 top (schematic designator J2)
J2F "LEMO 4-pin size 0" "LEMO SIZE 0, 4-PIN PCB" 77,10.8 r180 top (schematic designator J2)
J2G "LEMO 4-pin size 0" "LEMO SIZE 0, 4-PIN PCB" 91,10.8 r180 top (schematic designator J2)
J2H "LEMO 4-pin size 0" "LEMO SIZE 0, 4-PIN PCB" 105,10.8 r180 top (schematic designator J2)
J3A "LEMO 2-pin size 0" "LEMO SIZE 0, 2-PIN PCB" 130,10.8 r180 top locked (schematic designator J3)
J3B "LEMO 2-pin size 0" "LEMO SIZE 0, 2-PIN PCB" 144,10.8 r180 top (schematic designator J3)
J3C "LEMO 2-pin size 0" "LEMO SIZE 0, 2-PIN PCB" 158,10.8 r180 top (schematic designator J3)
J3D "LEMO 2-pin size 0" "LEMO SIZE 0, 2-PIN PCB" 172,10.8 r180 top (schematic designator J3)
L1A "513-1481-2-ND" "SMT Inductor 7 x 7mm" 129.2,41.14 r90 top (schematic designator L1)
L1B "513-1481-2-ND" "SMT Inductor 7 x 7mm" 143.2,41.14 r90 top (schematic designator L1)
L1C "513-1481-2-ND" "SMT Inductor 7 x 7mm" 157.2,41.14 r90 top (schematic designator L1)
L1D "513-1481-2-ND" "SMT Inductor 7 x 7mm" 171.2,41.14 r90 top (schematic designator L1)
L2A "513-1481-2-ND" "SMT Inductor 7 x 7mm" 127.8,21.74 r270 top (schematic designator L2)
L2B "513-1481-2-ND" "SMT Inductor 7 x 7mm" 141.8,21.74 r270 top (schematic designator L2)
L2C "513-1481-2-ND" "SMT Inductor 7 x 7mm" 155.8,21.74 r270 top (schematic designator L2)
L2D "513-1481-2-ND" "SMT Inductor 7 x 7mm" 169.8,21.74 r270 top (schematic designator L2)
P1 "Header 5X2" HDR2X5 5.766,81.051 r270 top
Q1 "FDV304P" SMD_SOT23_3 71.882,75.057 r270 top
R1 "Res 0805" SMD_0805 98.806,67.691 r270 bottom
R2 "Res 0805" SMD_0805 155.931,66.624 r270 bottom
R3A "Res 0805" SMD_0805 2.642,20.828 r90 bottom (schematic designator R3)
R3B "Res 0805" SMD_0805 16.642,20.828 r90 bottom (schematic designator R3)
R3C "Res 0805" SMD_0805 30.642,20.828 r90 bottom (schematic designator R3)
R3D "Res 0805" SMD_0805 44.642,20.828 r90 bottom (schematic designator R3)
R3E "Res 0805" SMD_0805 58.642,20.828 r90 bottom (schematic designator R3)
R3F "Res 0805" SMD_0805 72.642,20.828 r90 bottom (schematic designator R3)
R3G "Res 0805" SMD_0805 86.642,20.828 r90 bottom (schematic designator R3)
R3H "Res 0805" SMD_0805 100.642,20.828 r90 bottom (schematic designator R3)
R4A "Res 0805" SMD_0805 5.791,17.374 r90 bottom (schematic designator R4)
R4B "Res 0805" SMD_0805 19.791,17.374 r90 bottom (schematic designator R4)
R4C "Res 0805" SMD_0805 33.791,17.374 r90 bottom (schematic designator R4)
R4D "Res 0805" SMD_0805 47.791,17.374 r90 bottom (schematic designator R4)
R4E "Res 0805" SMD_0805 61.791,17.374 r90 bottom (schematic designator R4)
R4F "Res 0805" SMD_0805 75.791,17.374 r90 bottom (schematic designator R4)
R4G "Res 0805" SMD_0805 89.791,17.374 r90 bottom (schematic designator R4)
R4H "Res 0805" SMD_0805 103.791,17.374 r90 bottom (schematic designator R4)
R5A "Res 0805" SMD_0805 7.569,17.374 r90 bottom (schematic designator R5)
R5B "Res 0805" SMD_0805 21.569,17.374 r90 bottom (schematic designator R5)
R5C "Res 0805" SMD_0805 35.569,17.374 r90 bottom (schematic designator R5)
R5D "Res 0805" SMD_0805 49.569,17.374 r90 bottom (schematic designator R5)
R5E "Res 0805" SMD_0805 63.569,17.374 r90 bottom (schematic designator R5)
R5F "Res 0805" SMD_0805 77.569,17.374 r90 bottom (schematic designator R5)
R5G "Res 0805" SMD_0805 91.569,17.374 r90 bottom (schematic designator R5)
R5H "Res 0805" SMD_0805 105.569,17.374 r90 bottom (schematic designator R5)
R6A "S102" "VISHAY S102 SERIES" 6.375,30.505 r0 top (schematic designator R6)
R6B "S102" "VISHAY S102 SERIES" 20.375,30.505 r0 top (schematic designator R6)
R6C "S102" "VISHAY S102 SERIES" 34.375,30.505 r0 top (schematic designator R6)
R6D "S102" "VISHAY S102 SERIES" 48.375,30.505 r0 top (schematic designator R6)
R6E "S102" "VISHAY S102 SERIES" 62.375,30.505 r0 top (schematic designator R6)
R6F "S102" "VISHAY S102 SERIES" 76.375,30.505 r0 top (schematic designator R6)
R6G "S102" "VISHAY S102 SERIES" 90.375,30.505 r0 top (schematic designator R6)
R6H "S102" "VISHAY S102 SERIES" 104.375,30.505 r0 top (schematic designator R6)
R7A "1W (2512)" 6332[2512] 134.4,21.64 r90 top (schematic designator R7)
R7B "1W (2512)" 6332[2512] 148.4,21.64 r90 top (schematic designator R7)
R7C "1W (2512)" 6332[2512] 162.4,21.64 r90 top (schematic designator R7)
R7D "1W (2512)" 6332[2512] 176.4,21.64 r90 top (schematic designator R7)
R8A "Res 0805" SMD_0805 124.031,28.986 r270 bottom (schematic designator R8)
R8B "Res 0805" SMD_0805 138.031,28.986 r270 bottom (schematic designator R8)
R8C "Res 0805" SMD_0805 152.031,28.986 r270 bottom (schematic designator R8)
R8D "Res 0805" SMD_0805 166.031,28.986 r270 bottom (schematic designator R8)
R9A "Res 0805" SMD_0805 123.955,33.254 r90 bottom (schematic designator R9)
R9B "Res 0805" SMD_0805 137.955,33.254 r90 bottom (schematic designator R9)
R9C "Res 0805" SMD_0805 151.955,33.254 r90 bottom (schematic designator R9)
R9D "Res 0805" SMD_0805 165.955,33.254 r90 bottom (schematic designator R9)
RN1 "RES ARRAY  x4 10K" "RES ARRAY 0603 x 4" 123.696,56.108 r270 bottom
RN2 "RES ARRAY  x4" "RES ARRAY 0603 x 4" 16.325,77.457 r270 bottom
S1 "CJS-1200TB" CAS-120B 61.112,81.483 r180 top
TP1 "Test point" PAD_80D_052H 77.191,65.735 r90 top
TP2 "Test point" PAD_80D_052H 27.991,77.038 r90 top
TP3 "Test point" PAD_80D_052H 175.336,55.347 r90 top
TP4 "Test point" PAD_80D_052H 22.377,62.662 r90 top
TP5A "Test point" PAD_80D_052H 1.981,26.264 r90 top (schematic designator TP5)
TP5B "Test point" PAD_80D_052H 15.981,26.264 r90 top (schematic designator TP5)
TP5C "Test point" PAD_80D_052H 29.981,26.264 r90 top (schematic designator TP5)
TP5D "Test point" PAD_80D_052H 43.981,26.264 r90 top (schematic designator TP5)
TP5E "Test point" PAD_80D_052H 57.981,26.264 r90 top (schematic designator TP5)
TP5F "Test point" PAD_80D_052H 71.981,26.264 r90 top (schematic designator TP5)
TP5G "Test point" PAD_80D_052H 85.981,26.264 r90 top (schematic designator TP5)
TP5H "Test point" PAD_80D_052H 99.981,26.264 r90 top (schematic designator TP5)
TP6A "Test point" PAD_80D_052H 8.433,33.757 r90 top (schematic designator TP6)
TP6B "Test point" PAD_80D_052H 22.433,33.757 r90 top (schematic designator TP6)
TP6C "Test point" PAD_80D_052H 36.433,33.757 r90 top (schematic designator TP6)
TP6D "Test point" PAD_80D_052H 50.433,33.757 r90 top (schematic designator TP6)
TP6E "Test point" PAD_80D_052H 64.433,33.757 r90 top (schematic designator TP6)
TP6F "Test point" PAD_80D_052H 78.433,33.757 r90 top (schematic designator TP6)
TP6G "Test point" PAD_80D_052H 92.433,33.757 r90 top (schematic designator TP6)
TP6H "Test point" PAD_80D_052H 106.433,33.757 r90 top (schematic designator TP6)
TP7 "Test point" PAD_80D_052H 96.088,45.161 r90 top
TP9A "Test point" PAD_80D_052H 134.75,45.954 r90 top (schematic designator TP9)
TP9B "Test point" PAD_80D_052H 148.75,45.954 r90 top (schematic designator TP9)
TP9C "Test point" PAD_80D_052H 162.75,45.954 r90 top (schematic designator TP9)
TP9D "Test point" PAD_80D_052H 176.75,45.954 r90 top (schematic designator TP9)
TP10 "Test point" PAD_80D_052H 116.561,41.097 r90 top
TP11 "Test point" PAD_80D_052H 115.875,13.995 r90 top
TP12 "Test point" PAD_80D_052H 43.536,51.435 r90 top
U1 "XCR3128XL-10VQ100C" VQ100_N 51.073,71.588 r270 top
U2 "6A Pos Switching Regulator" "TEXAS Inst Switching Regulator" 82.95,62 r0 top
U3 "6A Pos Switching Regulator" "TEXAS Inst Switching Regulator" 140.075,61.95 r0 top
U4 "TXB0104" TSSOP14 126.454,56.672 r270 top
U5 "DAC8568" TSSOP16 102.006,55.823 r270 top
U6A "ADS1247" TSSOP20 12.074,26.861 r180 top (schematic designator U6)
U6B "ADS1247" TSSOP20 26.074,26.861 r180 top (schematic designator U6)
U6C "ADS1247" TSSOP20 40.074,26.861 r180 top (schematic designator U6)
U6D "ADS1247" TSSOP20 54.074,26.861 r180 top (schematic designator U6)
U6E "ADS1247" TSSOP20 68.074,26.861 r180 top (schematic designator U6)
U6F "ADS1247" TSSOP20 82.074,26.861 r180 top (schematic designator U6)
U6G "ADS1247" TSSOP20 96.074,26.861 r180 top (schematic designator U6)
U6H "ADS1247" TSSOP20 110.074,26.861 r180 top (schematic designator U6)
U7A "MAX1968" "TSSOP28 Exposed Pad" 125.375,28.648 r0 top (schematic designator U7)
U7B "MAX1968" "TSSOP28 Exposed Pad" 139.375,28.648 r0 top (schematic designator U7)
U7C "MAX1968" "TSSOP28 Exposed Pad" 153.375,28.648 r0 top (schematic designator U7)
U7D "MAX1968" "TSSOP28 Exposed Pad" 167.375,28.648 r0 top (schematic designator U7)
U8 "4.096V +/-0.5ppm" SO-8_M 93.624,53.721 r0 top
U9 "Voltage Reg, Pos Fixed" "TO-220 w/Heatsink 7136DG" 9.906,47.995 r0 top
U10 "SN74CBT3306PWLE" PW008_N 76.327,79.096 r270 top
U11 "M24C32RMN1" SOP8_N 69.063,80.289 r0 bottom
U12 "DS2411" SMD_SOT23_3 71.831,70.333 r90 top

## Footprints (in the part's own frame and the unit in brackets; to place one, negate y for a bottom-side part, rotate by r counter-clockwise, add the part's x,y. Pads: shape width x height; smd on the part's side, far side on the other; paste and mask are expansions set on the pad)
6332[2512] [mm] "Chip Resistor; Body 6.3 x 3.2 mm (LxW typ)"
  rect 1.8x3.2 smd: 1(-2.8,0) 2(2.8,0)
  silkscreen extent -1.6,-1.5 1.6,1.5
"CAP, Thru Hole 10mm dia" [mm]
  rect 2x2 hole 1.2: 1(2.5,0)
  round 2 hole 1.2: 2(-2.5,0)
  silkscreen extent 6,-1 8,1
CAS-120B [mm] "Copal Electronics CAS SMD Slide Switch"
  rect 1x1.5 smd: 1(-1.75,-1.95) 2(0,1.95) 3(1.75,-1.95)
  silkscreen extent -2.69,-1 2.69,1
HDR2X5 [mm] "Connector; Header; 5x2 Position"
  rect 1.5x1.5 hole 0.9: 1(0,0)
  round 1.5 hole 0.9: 2(0,2.54) 3(2.54,0) 4(2.54,2.54) 5(5.08,0) 6(5.08,2.54) 7(7.62,0) 8(7.62,2.54) 9(10.16,0) 10(10.16,2.54)
  silkscreen extent -1.27,-1.27 11.43,3.81
"LEMO SIZE 0, 2-PIN PCB" [mm]
  rect 2x2 hole 1 paste-0.152 mask-0.089: 1(0,-2.54)
  round 2 hole 1 paste-0.152 mask-0.089: 2(0,0)
  silkscreen extent -4.5,2 4.5,20.32
"LEMO SIZE 0, 4-PIN PCB" [mm]
  rect 2x2 hole 1 paste-0.152 mask-0.089: 1(1.27,-2.54)
  round 2 hole 1 paste-0.152 mask-0.089: 2(1.27,0) 3(-1.27,0) 4(-1.27,-2.54)
  silkscreen extent -4.5,2 4.5,20.32
PAD_80D_052H [mil]
  round 80 hole 52: 1(0,0)
"PCB EDGE, MOLEX 46114" [mil] "Mates with Molex 46114-4241"
  rect 264x383 smd far side paste-6 mask-3.5: P1(-213,908) P2(-213,1380.5)
  rect 264x383 smd paste-6 mask-3.5: P3(-213,908) P4(-213,1380.5)
  rect 264x30 smd far side paste-6 mask-3.5: S1(-213,32.5) S2(-213,82.5) S3(-213,132.5) S4(-213,182.5) S5(-213,232.5) S6(-213,282.5) S7(-213,332.5) S8(-213,382.5) S9(-213,432.5) S10(-213,482.5) S11(-213,532.5) S12(-213,582.5)
  rect 264x30 smd paste-6 mask-3.5: S13(-213,32.5) S14(-213,82.5) S15(-213,132.5) S16(-213,182.5) S17(-213,232.5) S18(-213,282.5) S19(-213,332.5) S20(-213,382.5) S21(-213,432.5) S22(-213,482.5) S23(-213,532.5) S24(-213,582.5)
PW008_N [mm] "SOP, 8-Leads, Body 3x4.4mm, Pitch 0.65mm, IPC Medium Density"
  oval 1.7x0.35 smd: 1(-2.85,0.975) 2(-2.85,0.325) 3(-2.85,-0.325) 4(-2.85,-0.975) 5(2.85,-0.975) 6(2.85,-0.325) 7(2.85,0.325) 8(2.85,0.975)
  silkscreen extent -2.97,-1.55 1.6,1.83, body extent -2.25,-1.55 2.25,1.55, height 3.1
"RES ARRAY 0603 x 4" [mm]
  rect 0.44x1.15 smd: 1(0,0.1) 2(0,2.05) 3(0.8,0.1) 4(0.8,2.05) 5(1.6,0.1) 6(1.6,2.05) 7(2.4,0.1) 8(2.4,2.05)
  silkscreen extent -0.6,-0.6 3,1.8
SMD_0805 [mil]
  rect 50x50 smd: 1(-45,0) 2(45,0)
  silkscreen extent -1,-1 1,1
SMD_CAP_6032 [mil]
  rect 100x100 smd: NEG(-115,0) POS(115,0)
  silkscreen extent -179,-110 195,64
SMD_SOT23_3 [mil]
  rect 36x36 smd: 1(-37,-43) 2(37,-43) 3(0,43)
  silkscreen extent -57,-25 57,25
"SMT Inductor 7 x 7mm" [mil] "Coiltronics SD7030 series"
  rect 100x280 smd: 1(-90,0) 2(91,0)
  silkscreen extent -150,-150 150,150
SO-8_M [mm] "8-Pin Small Outline Integrated Circuit 1.27 mm Pitch, IPC Low Density"
  oval 2.5x0.7 smd: 1(-2.45,1.905) 2(-2.45,0.635) 3(-2.45,-0.635) 4(-2.45,-1.905) 5(2.45,-1.905) 6(2.45,-0.635) 7(2.45,0.635) 8(2.45,1.905)
  silkscreen extent -2.57,-2.5 0.8,2.93, body extent -2,-2.5 2,2.5, height 1.75
SOP8_N [mm] "SOIC, 8-Leads, Body 4.9x3.9mm, Pitch 1.27mm, IPC Medium Density"
  oval 2x0.6 smd: 1(-2.5,1.905) 2(-2.5,0.635) 3(-2.5,-0.635) 4(-2.5,-1.905) 5(2.5,-1.905) 6(2.5,-0.635) 7(2.5,0.635) 8(2.5,1.905)
  silkscreen extent -2.62,-2.5 1.1,2.88, body extent -2,-2.5 2,2.5, height 1.75
"TARGET MECHANICAL 5" [mm]
"TEXAS Inst Switching Regulator" [mil] "Texas Instruments Integrated switching regulator"
  rect 115x115 hole 78: 1(0,750)
  round 115 hole 78: 2(0,0) 3(500,0) 4(625,0) 5(750,0) 6(1375,0) 7(1375,750)
  silkscreen extent -80,-80 1455,830
"TO-220 w/Heatsink 7136DG" [mil]
  round 70 hole 40: 1(100,98.42) 2(0,98.42) 3(-100,98.42)
  silkscreen extent -197,0 197,157
TSSOP14 [mm] "Shrink Small Outline; 14 Leads; Body Width 4.4 mm; Pitch 0.65 mm"
  rect 0.3x1.65 smd: 1(0,0) 2(0.65,0) 3(1.3,0) 4(1.95,0) 5(2.6,0) 6(3.25,0) 7(3.9,0) 8(3.9,5.55) 9(3.25,5.55) 10(2.6,5.55) 11(1.95,5.55) 12(1.3,5.55) 13(0.65,5.55) 14(0,5.55)
  silkscreen extent -0.82,-0.12 4.55,4.33
TSSOP16 [mm] "Shrink Small Outline; 16 Leads; Body Width 4.4 mm; Pitch 0.65 mm"
  rect 0.3x1.65 smd: 1(0,0) 2(0.65,0) 3(1.3,0) 4(1.95,0) 5(2.6,0) 6(3.25,0) 7(3.9,0) 8(4.5,0) 9(4.55,5.55) 10(3.9,5.55) 11(3.25,5.55) 12(2.6,5.55) 13(1.9,5.55) 14(1.3,5.55) 15(0.65,5.55) 16(0,5.55)
  silkscreen extent -0.82,-0.12 5.2,4.32
TSSOP20 [mm] "Shrink Small Outline; 20 Leads; Body Width 4.4 mm; Pitch 0.65 mm"
  rect 0.3x1.65 smd: 1(0,0) 2(0.65,0) 3(1.3,0) 4(1.95,0) 5(2.6,0) 6(3.25,0) 7(3.9,0) 8(4.5,0) 9(5.2,0) 10(5.85,0) 11(5.85,5.55) 12(5.2,5.55) 13(4.5,5.55) 14(3.9,5.55) 15(3.25,5.55) 16(2.6,5.55) 17(1.95,5.55) 18(1.3,5.55) 19(0.65,5.55) 20(0,5.55)
  silkscreen extent -0.83,-0.12 6.5,4.33
"TSSOP28 Exposed Pad" [mm] "Shrink Small Outline; 28 Leads; Body Width 4.4 mm; Pitch 0.65 mm"
  rect 0.3x1.65 smd: 1(0,0) 2(0.65,0) 3(1.3,0) 4(1.95,0) 5(2.6,0) 6(3.25,0) 7(3.9,0) 8(4.5,0) 9(5.2,0) 10(5.85,0) 11(6.5,0) 12(7.15,0) 13(7.8,0) 14(8.45,0) 15(8.45,5.7) 16(7.8,5.7) 17(7.15,5.7) 18(6.5,5.7) 19(5.85,5.7) 20(5.2,5.7) 21(4.5,5.7) 22(3.85,5.7) 23(3.15,5.7) 24(2.55,5.7) 25(1.95,5.7) 26(1.3,5.7) 27(0.65,5.7) 28(0,5.7)
  round 0.61 hole 0.356: 29(2.275,2.258) 29(2.275,3.292) 29(3.25,2.258) 29(3.25,3.292) 29(4.225,2.258) 29(4.225,3.292) 29(5.2,2.258) 29(5.2,3.292) 29(6.175,2.258) 29(6.175,3.292)
  rect 5.5x3.05 smd: 29(4.225,2.85)
  silkscreen extent -0.82,-0.12 9.14,4.57
"VISHAY S102 SERIES" [mil] "Matched pair"
  rect 60x60 hole 30: 1(-100,0)
  round 60 hole 30: 2(100,0)
  silkscreen extent -150,-50 150,50
VQ100_N [mm] "Thin QFP, 100-Leads, Body 14x14mm, Pitch 0.5mm, IPC Medium Density"
  oval 1.8x0.3 smd: 1(-7.55,6) 2(-7.55,5.5) 3(-7.55,5) 4(-7.55,4.5) 5(-7.55,4) 6(-7.55,3.5) 7(-7.55,3) 8(-7.55,2.5) 9(-7.55,2) 10(-7.55,1.5) 11(-7.55,1) 12(-7.55,0.5) 13(-7.55,0) 14(-7.55,-0.5) 15(-7.55,-1) 16(-7.55,-1.5) 17(-7.55,-2) 18(-7.55,-2.5) 19(-7.55,-3) 20(-7.55,-3.5) 21(-7.55,-4) 22(-7.55,-4.5) 23(-7.55,-5) 24(-7.55,-5.5) 25(-7.55,-6) 51(7.55,-6) 52(7.55,-5.5) 53(7.55,-5) 54(7.55,-4.5) 55(7.55,-4) 56(7.55,-3.5) 57(7.55,-3) 58(7.55,-2.5) 59(7.55,-2) 60(7.55,-1.5) 61(7.55,-1) 62(7.55,-0.5) 63(7.55,0) 64(7.55,0.5) 65(7.55,1) 66(7.55,1.5) 67(7.55,2) 68(7.55,2.5) 69(7.55,3) 70(7.55,3.5) 71(7.55,4) 72(7.55,4.5) 73(7.55,5) 74(7.55,5.5) 75(7.55,6)
  oval 0.3x1.8 smd: 26(-6,-7.55) 27(-5.5,-7.55) 28(-5,-7.55) 29(-4.5,-7.55) 30(-4,-7.55) 31(-3.5,-7.55) 32(-3,-7.55) 33(-2.5,-7.55) 34(-2,-7.55) 35(-1.5,-7.55) 36(-1,-7.55) 37(-0.5,-7.55) 38(0,-7.55) 39(0.5,-7.55) 40(1,-7.55) 41(1.5,-7.55) 42(2,-7.55) 43(2.5,-7.55) 44(3,-7.55) 45(3.5,-7.55) 46(4,-7.55) 47(4.5,-7.55) 48(5,-7.55) 49(5.5,-7.55) 50(6,-7.55) 76(6,7.55) 77(5.5,7.55) 78(5,7.55) 79(4.5,7.55) 80(4,7.55) 81(3.5,7.55) 82(3,7.55) 83(2.5,7.55) 84(2,7.55) 85(1.5,7.55) 86(1,7.55) 87(0.5,7.55) 88(0,7.55) 89(-0.5,7.55) 90(-1,7.55) 91(-1.5,7.55) 92(-2,7.55) 93(-2.5,7.55) 94(-3,7.55) 95(-3.5,7.55) 96(-4,7.55) 97(-4.5,7.55) 98(-5,7.55) 99(-5.5,7.55) 100(-6,7.55)
  silkscreen extent -7.67,-6.25 6.25,6.83, body extent -7,-7 7,7, height 1.2

## Part data
C1 C2 C3 C4 C6 C7 C8 C9 C14A C14B C14C C14D C14E C14F C14G C14H C15A C15B C15C C15D C15E C15F C15G C15H C16A C16B C16C C16D C16E C16F C16G C16H C20A C20B C20C C20D C20E C20F C20G C20H C25A C25B C25C C25D C28A C28B C28C C28D: library part "Cap SMD", "Capacitor"
C5 C10: library part "Cap Elec, 330 uF, 35V", "Radial Thru hole"
C11 C12 C17A C17B C17C C17D C17E C17F C17G C17H C18A C18B C18C C18D C18E C18F C18G C18H C19A C19B C19C C19D C19E C19F C19G C19H C21A C21B C21C C21D C22A C22B C22C C22D C23A C23B C23C C23D C24A C24B C24C C24D C26A C26B C26C C26D C27A C27B C27C C27D C32 C35 C36 C37 C38 C39 C40 C41 C42: "Capacitor"
C13 C29 C30 C31: library part Cap, "Capacitor"
C33 C34 C43: library part "Cap Tant 35V", "outline 6.0mm x 3.2mm"
J1: library part "Conn, PCB Card Edge / Molex 46114, 24 sig / 4 pwr", "PCB Edge Conn to fit Molex 46114 backplane connector"
J2A J2B J2C J2D J2E J2F J2G J2H: library part "LEMO Size 0, 4 pin, PCB"
J3A J3B J3C J3D: library part "LEMO Size 0, 2 pin, PCB"
L1A L1B L1C L1D L2A L2B L2C L2D: library part "Inductor SMD 7 x 7mm", "Inductor"
P1: "Header, 5-Pin, Dual row"
Q1: "P-MOSFET LOGIC LEVEL"
R1 R2 R3A R3B R3C R3D R3E R3F R3G R3H R4A R4B R4C R4D R4E R4F R4G R4H R5A R5B R5C R5D R5E R5F R5G R5H R8A R8B R8C R8D R9A R9B R9C R9D: library part "Res SMD", "Resistor 0805"
R6A R6B R6C R6D R6E R6F R6G R6H: library part "RES TH Radial", "Vishay Foil Resistor"
R7A R7B R7C R7D: library part "Res SMD"
RN1 RN2: "Resistor Array 4 Isolated"
S1: library part SW_SPDT_DOUG
TP1 TP2 TP3 TP4 TP5A TP5B TP5C TP5D TP5E TP5F TP5G TP5H TP6A TP6B TP6C TP6D TP6E TP6F TP6G TP6H TP7 TP9A TP9B TP9C TP9D TP10 TP11 TP12: "Test Point"
U1: "CoolRunner XPLA3 3.3V, 128 Macrocell CPLD, 84 User I/Os, 100-Pin VQFP, Commercial Grade"
U2 U3: library part PTN78020W, "Pos Adj Switching Regulator"
U4: "4-Chan Logic Level Shifter Bi-directional"
U5: "8 Chan, 16-bit DAC, SPI Interface"
U6A U6B U6C U6D U6E U6F U6G U6H: "24bit ADC for Temp Sensors"
U7A U7B U7C U7D: "TEC Driver +/- 3A"
U8: library part MAX6341, "VREF 4.096V 0.5ppm"
U9: "7805A"
U10: "Dual FET Bus Switch"
U11: "32 Kbit Serial I²C Bus EEPROM"
U12: "Silicon Serial Number"

## Via types
v1: diameter 0.61, hole 0.254, Top Layer (*.GTL) to Bottom Layer (*.GBL), tented both sides, 359 vias
v2: diameter 0.508, hole 0.254, Top Layer (*.GTL) to Bottom Layer (*.GBL), tented both sides, 105 vias
v3: diameter 0.508, hole 0.254, Top Layer (*.GTL) to Bottom Layer (*.GBL), 103 vias
v4: diameter 1.27, hole 0.711, Top Layer (*.GTL) to Bottom Layer (*.GBL), 17 vias

## Nets (pads, with @x,y where several pads share a name; then routed paths per layer and width w, separated by ;. In a path a pad name is that pad's centre, name@x,y a point inside that pad or via, vN(x,y) a via of type N, cw(c..) or ccw(c..) an arc to the next point about the centre after c; other vN are vias at no path point)
4.096VREF: C31.1 U5.8 U8.6 | length 14.6
  Top Layer (*.GTL) w0.254: U8.6@96.074,53.086 v3(98.044,53.086) ; v3(98.019,51.333) 98.029,51.323 U5.8@102.006,51.323
  MidLayer1 (*.G1) w0.254: v3(98.019,51.333) 98.019,53.061 v3(98.044,53.086)
  Bottom Layer (*.GBL) w0.254: v3(98.019,51.333) 104.191,51.333 C31.1@104.699,51.841
+5ANA: C13.2 C15A.2 C15B.2 C15C.2 C15D.2 C15E.2 C15F.2 C15G.2 C15H.2 C34.POS TP7.1 U5.3 U6A.14 U6B.14 U6C.14 U6D.14 U6E.14 U6F.14 U6G.14 U6H.14 U9.3 | length 64.1
  Top Layer (*.GTL) w0.254: U6A.14@8.174,21.311 8.174,19.577 8.484,19.267 8.484,18.542 8.712,18.313 10.211,18.313 C15A.2@10.516,18.618 11.379,18.618 11.506,18.745 v1(11.506,19.583) ; U6B.14@22.174,21.311 22.174,19.577 22.484,19.267 22.484,18.542 22.712,18.313 24.211,18.313 C15B.2@24.516,18.618 25.324,18.618 25.506,18.801 v1(25.506,19.583) ; U6C.14@36.174,21.311 36.174,19.577 36.484,19.267 36.484,18.542 36.712,18.313 38.211,18.313 C15C.2@38.516,18.618 39.319,18.618 39.506,18.805 v1(39.506,19.583) ; U6D.14@50.174,21.311 50.174,19.577 50.484,19.267 50.484,18.542 50.712,18.313 52.211,18.313 C15D.2@52.516,18.618 53.213,18.618 53.506,18.911 v1(53.506,19.583) ; U6E.14@64.174,21.311 64.174,19.577 64.484,19.267 64.484,18.542 64.712,18.313 66.211,18.313 C15E.2@66.516,18.618 66.541,18.618 v1(67.506,19.583) ; U6F.14@78.174,21.311 78.174,19.577 78.484,19.267 78.484,18.542 78.712,18.313 80.211,18.313 C15F.2@80.516,18.618 80.541,18.618 v1(81.506,19.583) ; U6G.14@92.174,21.311 92.174,19.577 92.484,19.267 92.484,18.542 92.712,18.313 94.211,18.313 C15G.2@94.516,18.618 94.541,18.618 v1(95.506,19.583) ; U5.3@102.006,54.523 103.414,54.523 v3(103.454,54.483) ; U6H.14@106.174,21.311 106.174,19.577 106.484,19.267 106.484,18.542 106.712,18.313 108.211,18.313 C15H.2@108.516,18.618 109.481,19.583 v1(109.506,19.583)
  Bottom Layer (*.GBL) w0.254: v3(103.454,54.483) 104.623,54.483 C13.2@104.673,54.534
  Bottom Layer (*.GBL) w1.27: v4(4.216,50.495) 8.001,54.28 C34.POS@8.001,56.159
+5VTEC1: C5.1 C12.1 C22A.2 C22B.2 C23A.2 C23B.2 C24A.2 C24B.2 TP1.1 U2.6 U4.14 U7A.1 U7A.9 U7A.11 U7A.12 U7A.18 U7A.20 U7B.1 U7B.9 U7B.11 U7B.12 U7B.18 U7B.20 | length 78.5
  Top Layer (*.GTL) w0.254: U7A.1@125.375,28.648 125.375,27.033 v1(125.377,27.031) ; v1(130.508,36.175) 130.575,36.108 U7A.20@130.575,34.348 ; U7A.9@130.575,28.648 130.575,27.065 v1(130.584,27.056) ; v3(131.801,57.912) 132.004,57.709 U4.14@132.004,56.672 ; U7A.11@131.875,28.648 v1@131.875,27.086 ; U7A.18@131.875,34.348 131.875,36.17 v1(131.88,36.175) ; v1(131.88,27.081) v1@131.875,27.086 ; U7A.12@132.525,28.648 132.525,27.736 v1@131.875,27.086 ; U7B.1@139.375,28.648 139.375,27.033 v1(139.377,27.031) ; v1(144.508,36.175) 144.575,36.108 U7B.20@144.575,34.348 ; U7B.9@144.575,28.648 144.575,27.065 v1(144.584,27.056) ; U7B.11@145.875,28.648 v1@145.875,27.086 ; U7B.18@145.875,34.348 145.875,36.17 v1(145.88,36.175) ; v1(145.88,27.081) v1@145.875,27.086 ; U7B.12@146.525,28.648 146.525,27.736 v1@145.875,27.086
  Top Layer (*.GTL) w1.27: TP1.1@77.191,65.735 106.883,65.735 110.618,62 U2.6@117.875,62
  Bottom Layer (*.GBL) w0.254: v1(125.377,27.031) 125.86,27.031 C23A.2@127.028,25.862 ; C12.1@129.286,56.693 130.15,56.693 131.369,57.912 v3(131.801,57.912) ; v1(130.508,36.175) 130.559,36.225 C22A.2@130.559,37.826 ; v1(130.584,27.056) 131.168,26.472 C24A.2@131.168,25.43 ; v1(139.377,27.031) 139.86,27.031 C23B.2@141.028,25.862 ; v1(144.508,36.175) 144.559,36.225 C22B.2@144.559,37.826 ; v1(144.584,27.056) 145.168,26.472 C24B.2@145.168,25.43
+5VTEC2: C10.1 C22C.2 C22D.2 C23C.2 C23D.2 C24C.2 C24D.2 TP3.1 U3.6 U7C.1 U7C.9 U7C.11 U7C.12 U7C.18 U7C.20 U7D.1 U7D.9 U7D.11 U7D.12 U7D.18 U7D.20 | length 31.9
  Top Layer (*.GTL) w0.254: U7C.1@153.375,28.648 153.375,27.033 v1(153.377,27.031) ; v1(158.508,36.175) 158.575,36.108 U7C.20@158.575,34.348 ; U7C.9@158.575,28.648 158.575,27.065 v1(158.584,27.056) ; U7C.11@159.875,28.648 v1@159.875,27.086 ; U7C.18@159.875,34.348 159.875,36.17 v1(159.88,36.175) ; v1(159.88,27.081) v1@159.875,27.086 ; U7C.12@160.525,28.648 160.525,27.736 v1@159.875,27.086 ; U7D.1@167.375,28.648 167.375,27.033 v1(167.377,27.031) ; v1(172.508,36.175) 172.575,36.108 U7D.20@172.575,34.348 ; U7D.9@172.575,28.648 172.575,27.065 v1(172.584,27.056) ; U7D.11@173.875,28.648 v1@173.875,27.086 ; U7D.18@173.875,34.348 173.875,36.17 v1(173.88,36.175) ; v1(173.88,27.081) v1@173.875,27.086 ; U7D.12@174.525,28.648 174.525,27.736 v1@173.875,27.086
  Bottom Layer (*.GBL) w0.254: v1(153.377,27.031) 153.86,27.031 C23C.2@155.028,25.862 ; v1(158.508,36.175) 158.559,36.225 C22C.2@158.559,37.826 ; v1(158.584,27.056) 159.168,26.472 C24C.2@159.168,25.43 ; v1(167.377,27.031) 167.86,27.031 C23D.2@169.028,25.862 ; v1(172.508,36.175) 172.559,36.225 C22D.2@172.559,37.826 ; v1(172.584,27.056) 173.168,26.472 C24D.2@173.168,25.43
+12V: C29.1 C33.POS J1.P3 TP4.1 U8.2 U9.1 | length 142.4
  Top Layer (*.GTL) w0.635: v4(13.056,53.391) 14.097,53.391 16.358,55.651 v4(23.063,55.651) ; v4(87.122,54.077) 87.401,54.356 U8.2@91.174,54.356
  Top Layer (*.GTL) w1.27: J1.P3@-5.95,53.063 -4.759,54.254 0.33,54.254 1.194,53.391 v4(13.056,53.391) 12.446,52.781 U9.1@12.446,50.495 10.617,48.666 2.896,48.666 1.295,50.267 -3.154,50.267 J1.P3@-5.95,53.063
  MidLayer1 (*.G1) w0.635: TP4.1@22.377,62.662 23.063,61.976 v4(23.063,55.651)
  Bottom Layer (*.GBL) w0.635: v4(23.063,55.651) 38.118,55.651 39.045,56.578 39.644,56.578 39.746,56.477 57.18,56.477 57.917,57.213 84.01,57.213 87.122,54.102 v4(87.122,54.077) 87.249,54.204 92.431,54.204 C29.1@93.599,55.372
  Bottom Layer (*.GBL) w1.27: v4(13.056,53.391) C33.POS@13.056,56.286
+24V: C1.2 C2.2 C3.2 C4.2 C6.2 C7.2 C8.2 C9.2 C43.POS J1.P4 TP2.1 U2.2 U3.2 | length 37.6
  Top Layer (*.GTL) w1.27: v4(-0.308,67.687) -3.327,67.687 J1.P4@-5.95,65.065 -4.166,63.28 -0.085,63.28 v4(-0.076,63.271) ; C43.POS@7.239,64.262 7.239,66.802 v4(7.264,66.827)
  Bottom Layer (*.GBL) w1.27: C1.2@82.931,73.482 C4.2@82.931,71.628 C3.2@82.931,69.596 C2.2@82.931,67.564 82.931,62.019 U2.2@82.95,62 ; U3.2@140.075,61.95 140.081,61.956 C6.2@140.081,65.532 C7.2@140.081,67.564 C8.2@140.081,69.85 C9.2@140.081,72.136
A: C13.1 C14A.1 C14B.1 C14C.1 C14D.1 C14E.1 C14F.1 C14G.1 C14H.1 C15A.1 C15B.1 C15C.1 C15D.1 C15E.1 C15F.1 C15G.1 C15H.1 C17A.1 C17B.1 C17C.1 C17D.1 C17E.1 C17F.1 C17G.1 C17H.1 C19A.1 C19B.1 C19C.1 C19D.1 C19E.1 C19F.1 C19G.1 C19H.1 C20A.1 C20B.1 C20C.1 C20D.1 C20E.1 C20F.1 C20G.1 C20H.1 C29.2 C30.2 C31.2 C33.NEG C34.NEG J1.P1 R6A.1 R6B.1 R6C.1 R6D.1 R6E.1 R6F.1 R6G.1 R6H.1 TP10.1 TP11.1 TP12.1 U5.14 U6A.6 U6A.8 U6A.13 U6B.6 U6B.8 U6B.13 U6C.6 U6C.8 U6C.13 U6D.6 U6D.8 U6D.13 U6E.6 U6E.8 U6E.13 U6F.6 U6F.8 U6F.13 U6G.6 U6G.8 U6G.13 U6H.6 U6H.8 U6H.13 U8.4 U9.2 | length 191.4
  Top Layer (*.GTL) w0.254: C14A.1@2.642,19.685 2.642,18.263 v1(3.404,17.501) 5.334,17.501 5.791,17.043 C17A.1@5.791,16.231 ; C19A.1@7.569,16.231 7.569,17.17 7.899,17.501 v1(9.728,17.501) ; U6A.13@7.574,21.311 7.574,22.128 8.661,23.216 8.661,24.511 v1(8.128,25.044) ; U6A.8@7.574,26.861 7.574,25.598 v1(8.128,25.044) ; U6A.6@8.824,26.861 8.824,25.741 v1(8.128,25.044) ; v1(12.776,17.247) 12.802,17.272 C15A.1@12.802,18.618 ; C14B.1@16.642,19.685 16.642,18.263 v1(17.404,17.501) 19.334,17.501 19.791,17.043 C17B.1@19.791,16.231 ; C19B.1@21.569,16.231 21.569,17.17 21.899,17.501 v1(23.728,17.501) ; U6B.13@21.574,21.311 21.574,22.128 22.661,23.216 22.661,24.511 v1(22.128,25.044) ; U6B.8@21.574,26.861 21.574,25.598 v1(22.128,25.044) ; U6B.6@22.824,26.861 22.824,25.741 v1(22.128,25.044) ; v1(26.776,17.247) 26.802,17.272 C15B.1@26.802,18.618 ; C14C.1@30.642,19.685 30.642,18.263 v1(31.404,17.501) 33.334,17.501 33.791,17.043 C17C.1@33.791,16.231 ; C19C.1@35.569,16.231 35.569,17.17 35.899,17.501 v1(37.728,17.501) ; U6C.13@35.574,21.311 35.574,22.128 36.661,23.216 36.661,24.511 v1(36.128,25.044) ; U6C.8@35.574,26.861 35.574,25.598 v1(36.128,25.044) ; U6C.6@36.824,26.861 36.824,25.741 v1(36.128,25.044) ; v1(40.776,17.247) 40.802,17.272 C15C.1@40.802,18.618 ; C14D.1@44.642,19.685 44.642,18.263 v1(45.404,17.501) 47.334,17.501 47.791,17.043 C17D.1@47.791,16.231 ; C19D.1@49.569,16.231 49.569,17.17 49.899,17.501 v1(51.728,17.501) ; U6D.13@49.574,21.311 49.574,22.128 50.661,23.216 50.661,24.511 v1(50.128,25.044) ; U6D.8@49.574,26.861 49.574,25.598 v1(50.128,25.044) ; U6D.6@50.824,26.861 50.824,25.741 v1(50.128,25.044) ; v1(54.776,17.247) 54.802,17.272 C15D.1@54.802,18.618 ; C14E.1@58.642,19.685 58.642,18.263 v1(59.404,17.501) 61.334,17.501 61.791,17.043 C17E.1@61.791,16.231 ; C19E.1@63.569,16.231 63.569,17.17 63.899,17.501 v1(65.728,17.501) ; U6E.13@63.574,21.311 63.574,22.128 64.661,23.216 64.661,24.511 v1(64.128,25.044) ; U6E.8@63.574,26.861 63.574,25.598 v1(64.128,25.044) ; U6E.6@64.824,26.861 64.824,25.741 v1(64.128,25.044) ; v1(68.776,17.247) 68.802,17.272 C15E.1@68.802,18.618 ; C14F.1@72.642,19.685 72.642,18.263 v1(73.404,17.501) 75.334,17.501 75.791,17.043 C17F.1@75.791,16.231 ; C19F.1@77.569,16.231 77.569,17.17 77.899,17.501 v1(79.728,17.501) ; U6F.13@77.574,21.311 77.574,22.128 78.661,23.216 78.661,24.511 v1(78.128,25.044) ; U6F.8@77.574,26.861 77.574,25.598 v1(78.128,25.044) ; U6F.6@78.824,26.861 78.824,25.741 v1(78.128,25.044) ; v1(82.776,17.247) 82.802,17.272 C15F.1@82.802,18.618 ; C14G.1@86.642,19.685 86.642,18.263 v1(87.404,17.501) 89.334,17.501 89.791,17.043 C17G.1@89.791,16.231 ; v3(89.23,51.435) 89.459,51.664 91.022,51.664 U8.4@91.174,51.816 ; C19G.1@91.569,16.231 91.569,17.17 91.899,17.501 v1(93.728,17.501) ; U6G.13@91.574,21.311 91.574,22.128 92.661,23.216 92.661,24.511 v1(92.128,25.044) ; U6G.8@91.574,26.861 91.574,25.598 v1(92.128,25.044) ; U6G.6@92.824,26.861 92.824,25.741 v1(92.128,25.044) ; v1(96.776,17.247) 96.802,17.272 C15G.1@96.802,18.618 ; C14H.1@100.642,19.685 100.642,18.263 v1(101.404,17.501) 103.334,17.501 103.791,17.043 C17H.1@103.791,16.231 ; C19H.1@105.569,16.231 105.569,17.17 105.899,17.501 v1(107.728,17.501) ; U6H.13@105.574,21.311 105.574,22.128 106.661,23.216 106.661,24.511 v1(106.128,25.044) ; U6H.8@105.574,26.861 105.574,25.598 v1(106.128,25.044) ; U6H.6@106.824,26.861 106.824,25.741 v1(106.128,25.044) ; U5.14@107.556,54.523 v3(109.256,54.523) ; v1(110.776,17.247) 110.802,17.272 C15H.1@110.802,18.618
  Bottom Layer (*.GBL) w0.254: J1.P1@-5.95,53.063 J1.P1@-5.95,54.375 ; C20A.1@6.858,31.445 v1(6.858,32.614) ; C20B.1@20.858,31.445 v1(20.858,32.614) ; C20C.1@34.858,31.445 v1(34.858,32.614) ; C20D.1@48.858,31.445 v1(48.858,32.614) ; C20E.1@62.858,31.445 v1(62.858,32.614) ; C20F.1@76.858,31.445 v1(76.858,32.614) ; C20G.1@90.858,31.445 v1(90.858,32.614) ; v3(93.599,48.158) C30.2@93.599,49.86 ; C29.2@93.599,57.658 94.488,57.658 v3(95.148,56.998) ; C13.1@104.673,56.82 v3(106.02,56.82) ; C31.2@104.699,49.555 105.562,48.692 v3(105.562,48.082) ; C20H.1@104.858,31.445 v1(104.858,32.614)
  Bottom Layer (*.GBL) w1.27: J1.P1@-5.95,53.063 -5.313,52.426 v4(-0.889,52.426) ; J1.P1@-5.95,54.375 -4.242,56.083 v4(-0.914,56.083) 2.083,56.083 C34.NEG@2.159,56.159 ; C33.NEG@18.898,56.286 19.253,56.286 v4(21.488,54.051)
A0: J1.S1 U1.47 | length 74.3
  Top Layer (*.GTL) w0.254: v1(33.401,48.59) 33.401,48.678 33.985,49.263 33.985,49.747 33.884,49.848 33.884,50.771 35.69,52.578 v2@40.691,52.578 ; v2(40.818,67.031) 40.945,67.158 41.598,67.158 41.667,67.088 U1.47@43.523,67.088
  MidLayer1 (*.G1) w0.254: v2(40.665,52.603) 40.691,52.629 40.691,66.904 v2(40.818,67.031)
  Bottom Layer (*.GBL) w0.254: J1.S1@-5.95,30.825 -5.438,31.338 0.886,31.338 10.708,41.16 10.708,41.597 12,42.889 15.091,42.889 20.513,48.311 32.694,48.311 32.973,48.59 v1(33.401,48.59)
A1: J1.S2 U1.48 | length 72.4
  Top Layer (*.GTL) w0.254: v1(33.401,49.505) 33.401,49.932 33.477,50.009 33.477,50.829 33.422,50.884 35.725,53.188 v2(41.224,53.188) ; v2(41.377,66.624) 43.487,66.624 U1.48@43.523,66.588
  MidLayer1 (*.G1) w0.254: v2(41.224,53.188) 41.224,53.289 41.326,53.391 41.326,66.573 v2(41.377,66.624)
  Bottom Layer (*.GBL) w0.254: J1.S2@-5.95,32.095 -5.366,32.68 0.576,32.68 9.882,41.986 10.523,41.986 13.799,45.263 16.89,45.263 20.345,48.717 32.525,48.717 33.313,49.505 v1(33.401,49.505)
A2: J1.S3 U1.49 | length 70.9
  Top Layer (*.GTL) w0.254: v1(32.487,49.505) 32.487,49.593 33.071,50.177 33.071,50.661 32.969,50.763 32.969,51.006 35.862,53.899 v2@41.859,53.899 ; v2(41.885,66.091) 41.887,66.088 U1.49@43.523,66.088
  MidLayer1 (*.G1) w0.254: v2(41.859,53.873) 41.885,53.899 v2(41.885,66.091)
  Bottom Layer (*.GBL) w0.254: J1.S3@-5.95,33.365 -5.438,33.878 1.199,33.878 9.714,42.393 10.354,42.393 13.631,45.669 16.722,45.669 20.176,49.124 31.678,49.124 32.059,49.505 v1(32.487,49.505)
A3: J1.S4 U1.50 | length 69.2
  Top Layer (*.GTL) w0.254: v1(32.487,50.419) 32.487,50.847 32.563,50.923 32.563,51.175 35.947,54.559 v2(43.51,54.559) ; U1.50@43.523,65.588 43.523,64.808 v2(43.536,64.795)
  MidLayer1 (*.G1) w0.254: v2(43.51,54.559) 43.536,54.585 v2(43.536,64.795)
  Bottom Layer (*.GBL) w0.254: J1.S4@-5.95,34.635 -5.438,35.148 1.895,35.148 9.546,42.799 10.186,42.799 13.462,46.076 16.553,46.076 20.008,49.53 31.509,49.53 32.398,50.419 v1(32.487,50.419)
A4: J1.S5 U1.45 | length 70.5
  Top Layer (*.GTL) w0.254: v1(31.572,50.419) 31.572,50.507 32.156,51.091 32.156,51.343 36.033,55.22 v2@40.107,55.22 ; v2(40.208,68.123) 40.208,68.104 40.224,68.088 U1.45@43.523,68.088
  MidLayer1 (*.G1) w0.254: v2(40.107,55.245) 40.208,55.347 v2(40.208,68.123)
  Bottom Layer (*.GBL) w0.254: J1.S5@-5.95,35.905 -5.438,36.418 2.59,36.418 9.377,43.205 10.018,43.205 13.294,46.482 16.385,46.482 19.84,49.936 30.75,49.936 31.233,50.419 v1(31.572,50.419)
A5: J1.S6 U1.41 | length 71.4
  Top Layer (*.GTL) w0.254: v1(31.572,51.333) 36.119,55.88 v2@39.345,55.88 ; v2(39.446,70.104) 39.462,70.088 U1.41@43.523,70.088
  MidLayer1 (*.G1) w0.254: v2(39.345,55.855) 39.446,55.956 v2(39.446,70.104)
  Bottom Layer (*.GBL) w0.254: J1.S6@-5.95,37.175 -5.438,37.688 3.285,37.688 9.209,43.612 9.849,43.612 13.126,46.888 16.217,46.888 19.671,50.343 30.493,50.343 31.484,51.333 v1(31.572,51.333)
B0: J1.S7 U1.5 | length 95.6
  Top Layer (*.GTL) w0.254: v1(30.658,51.333) 30.746,51.333 31.33,51.918 31.582,51.918 36.204,56.54 v2@58.217,56.54 ; U1.5@55.073,79.138 55.073,77.413 v2(56.794,75.692)
  MidLayer1 (*.G1) w0.254: v2(56.794,75.692) 56.794,65.888 58.166,64.516 58.166,56.54 v2(58.217,56.49)
  Bottom Layer (*.GBL) w0.254: J1.S7@-5.95,38.445 3.468,38.445 9.041,44.018 9.681,44.018 12.957,47.295 16.048,47.295 19.503,50.749 30.074,50.749 v1(30.658,51.333)